# Altium PCB UAV_States_PCB.PcbDoc
Units mm, origin at the board's own origin, x right, y up, seen from the top; angles counter-clockwise.
Board outline 50 x 50 mm, 4 copper layers (Top Layer, GND, PWR, Bottom Layer), stack 1.54 mm thick; 72 components, 62 nets, 356 pads, 125 vias.
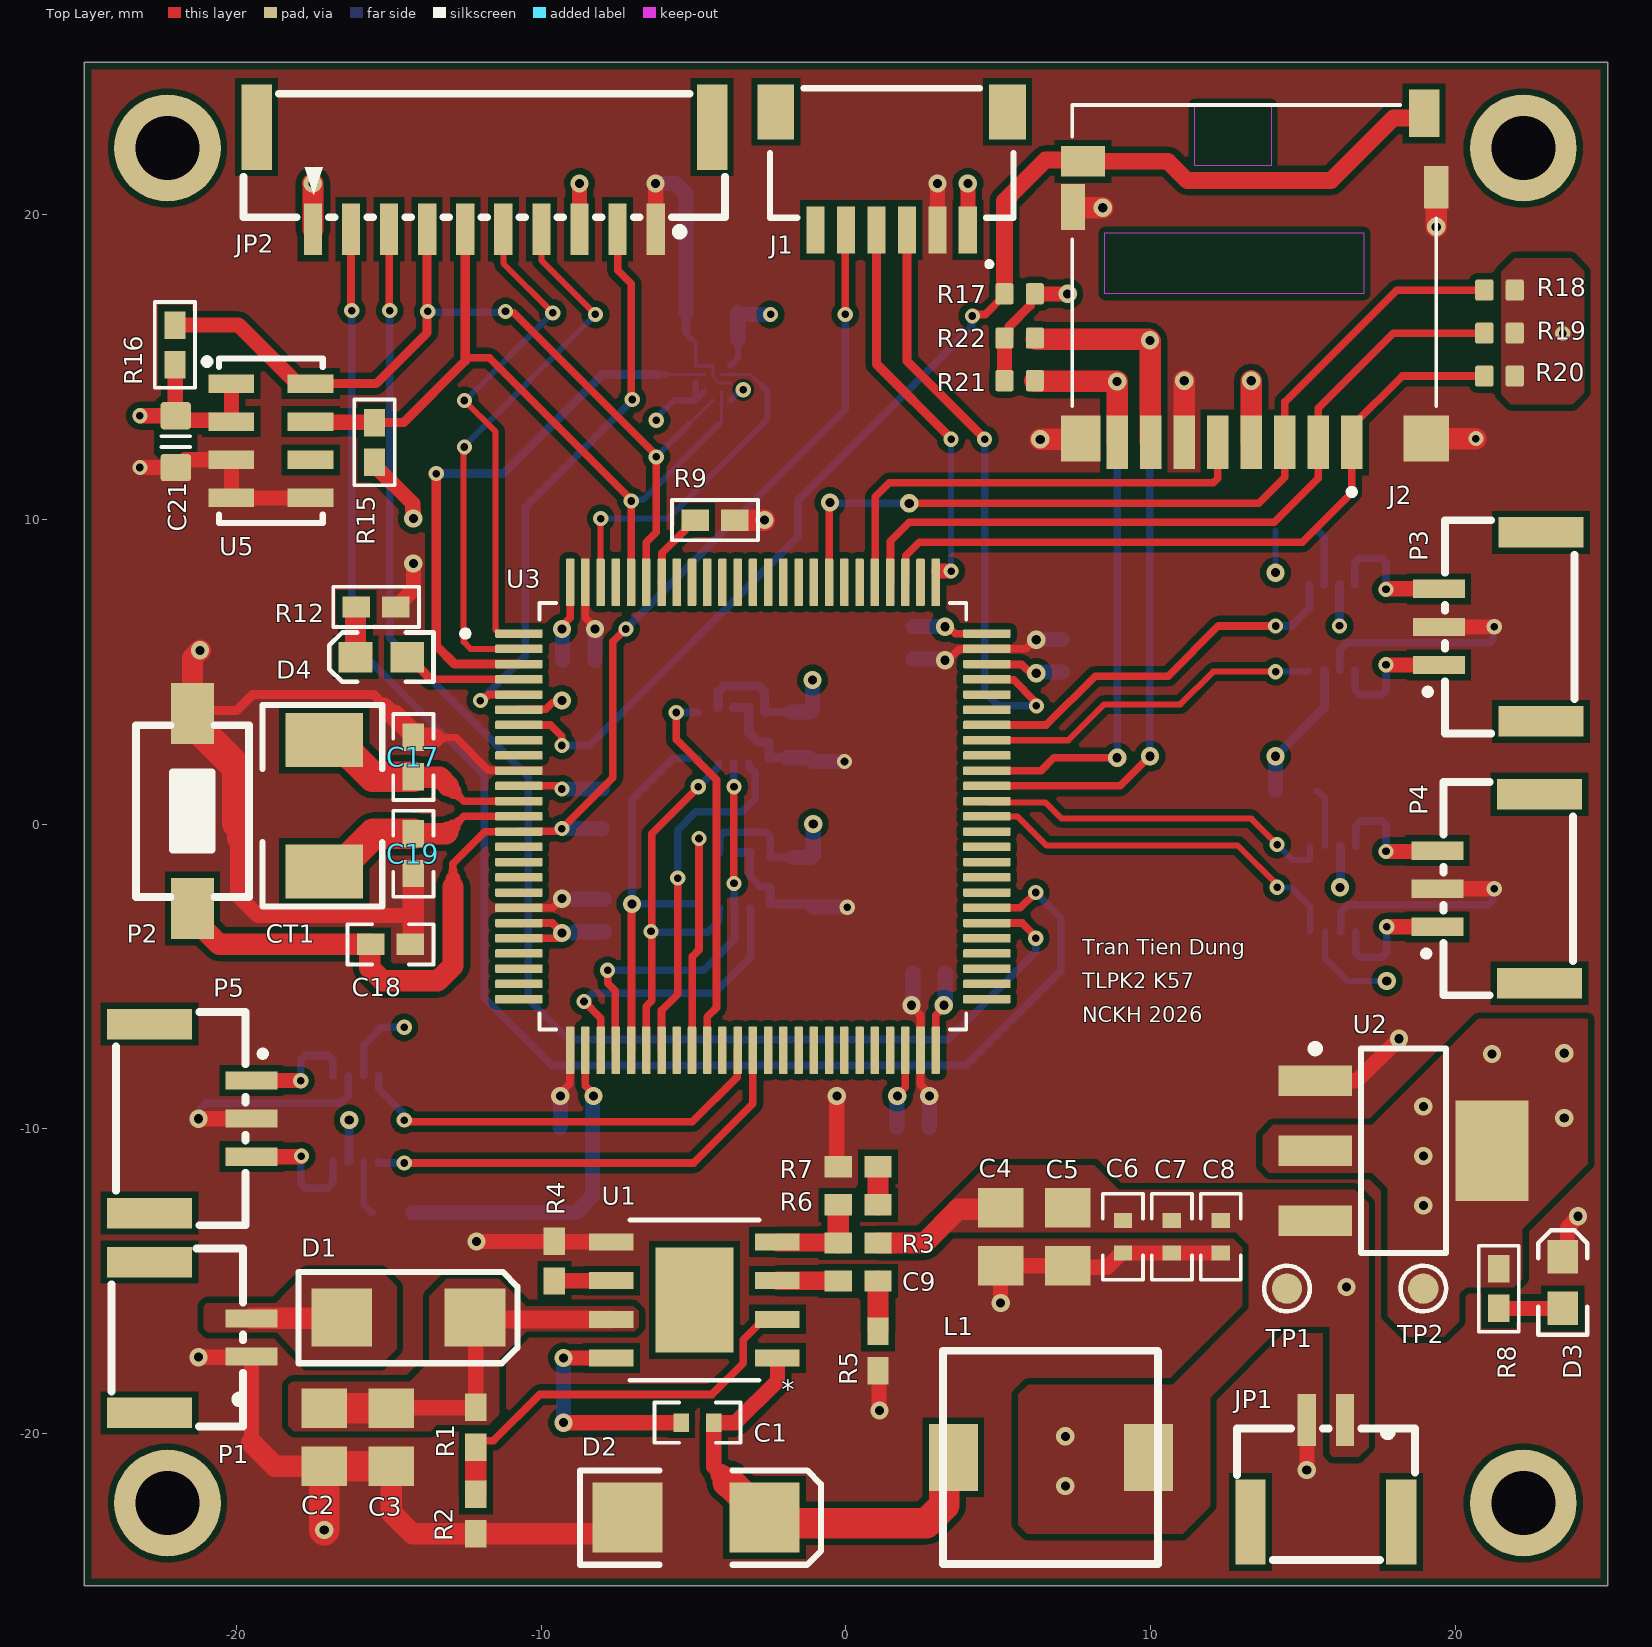
[diagram p0: Top Layer view]
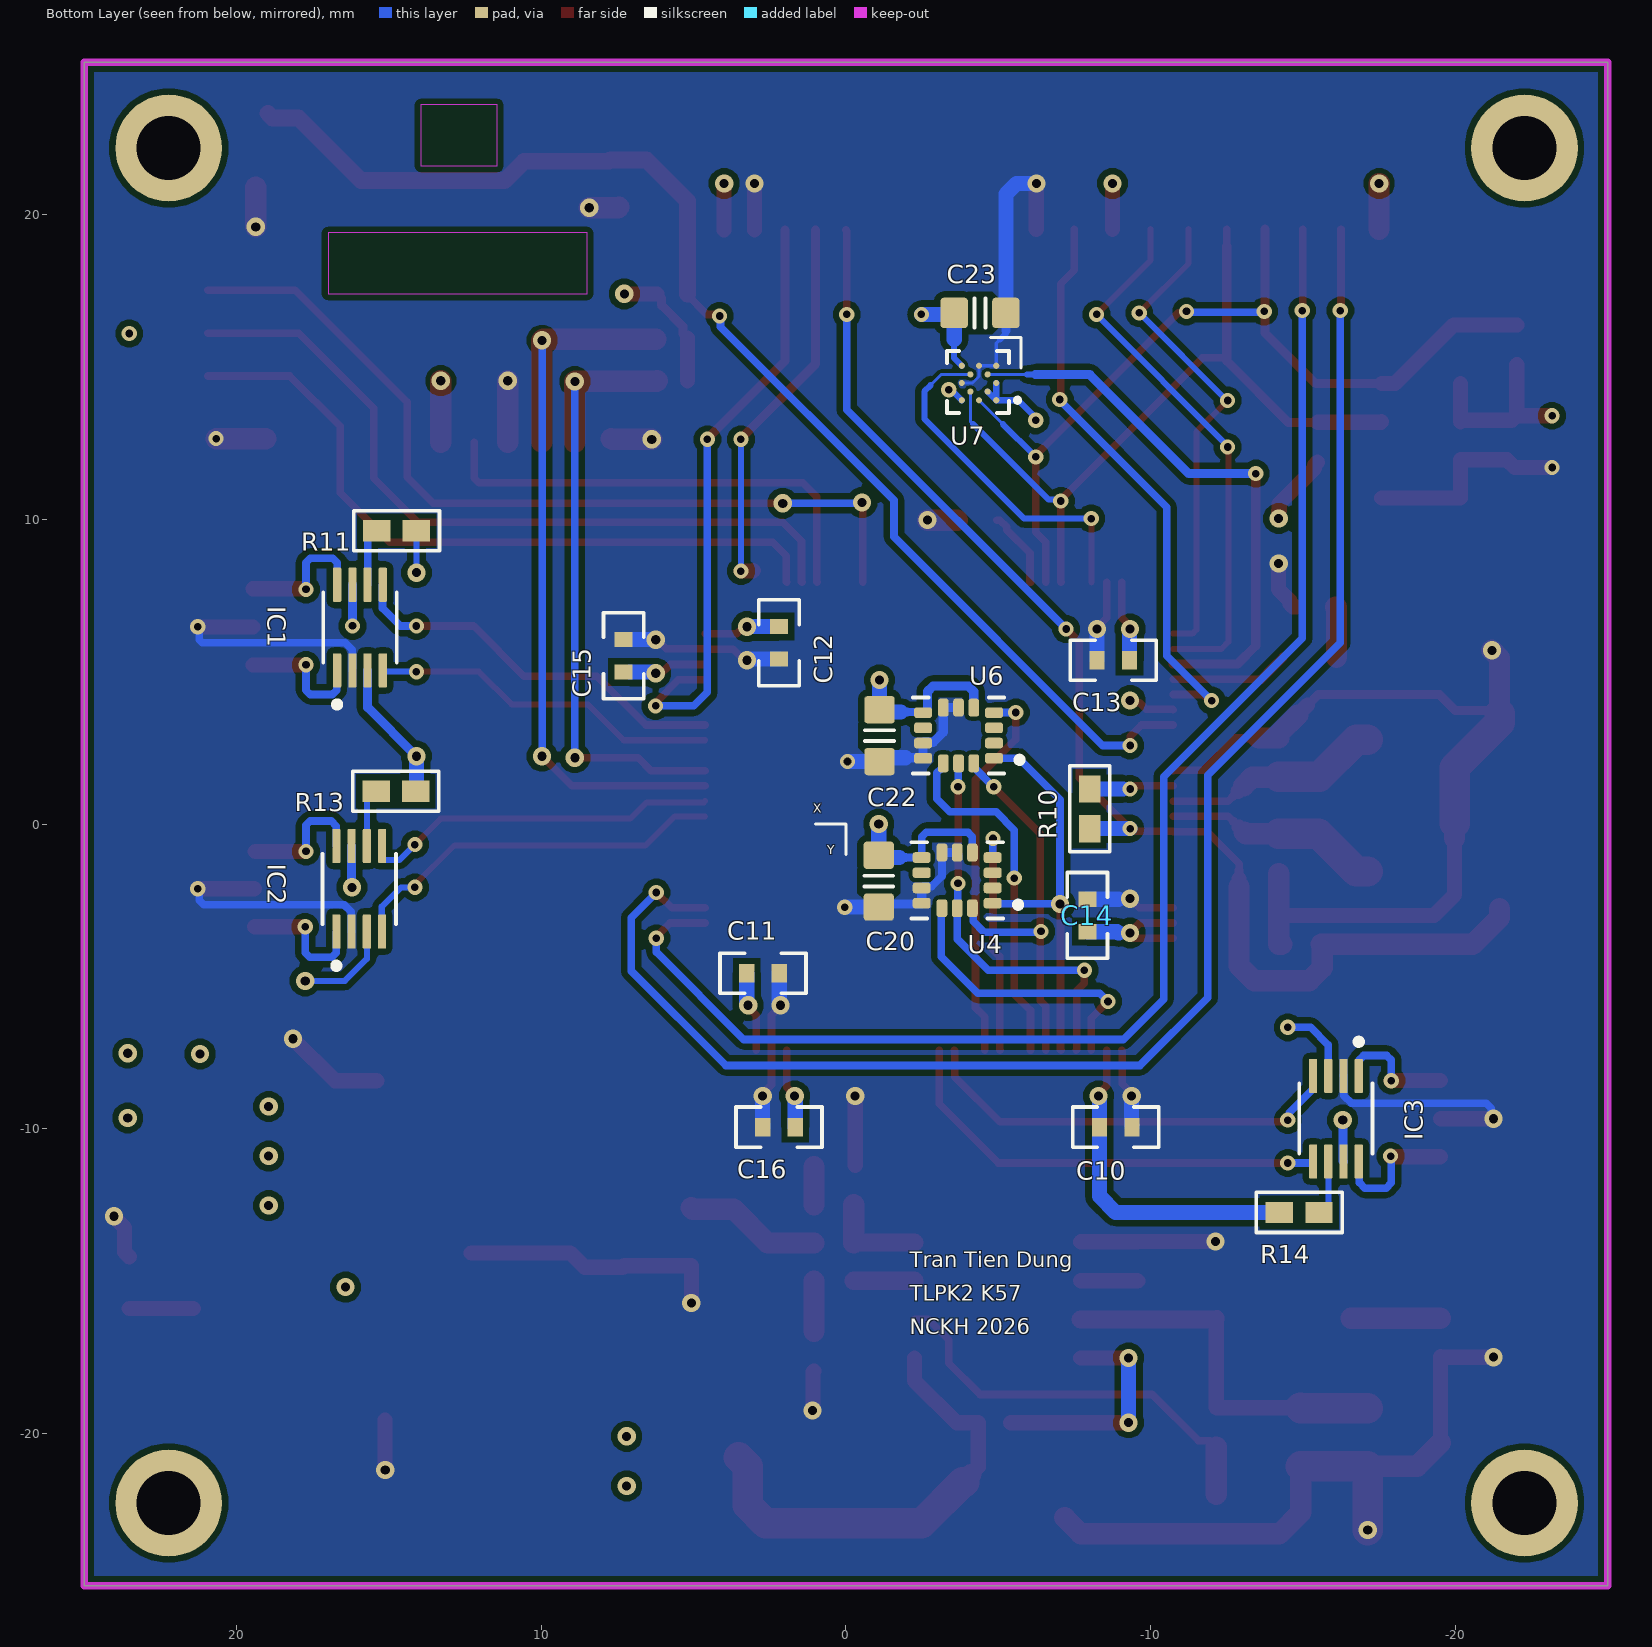
[diagram p1: Bottom Layer view, seen from below]
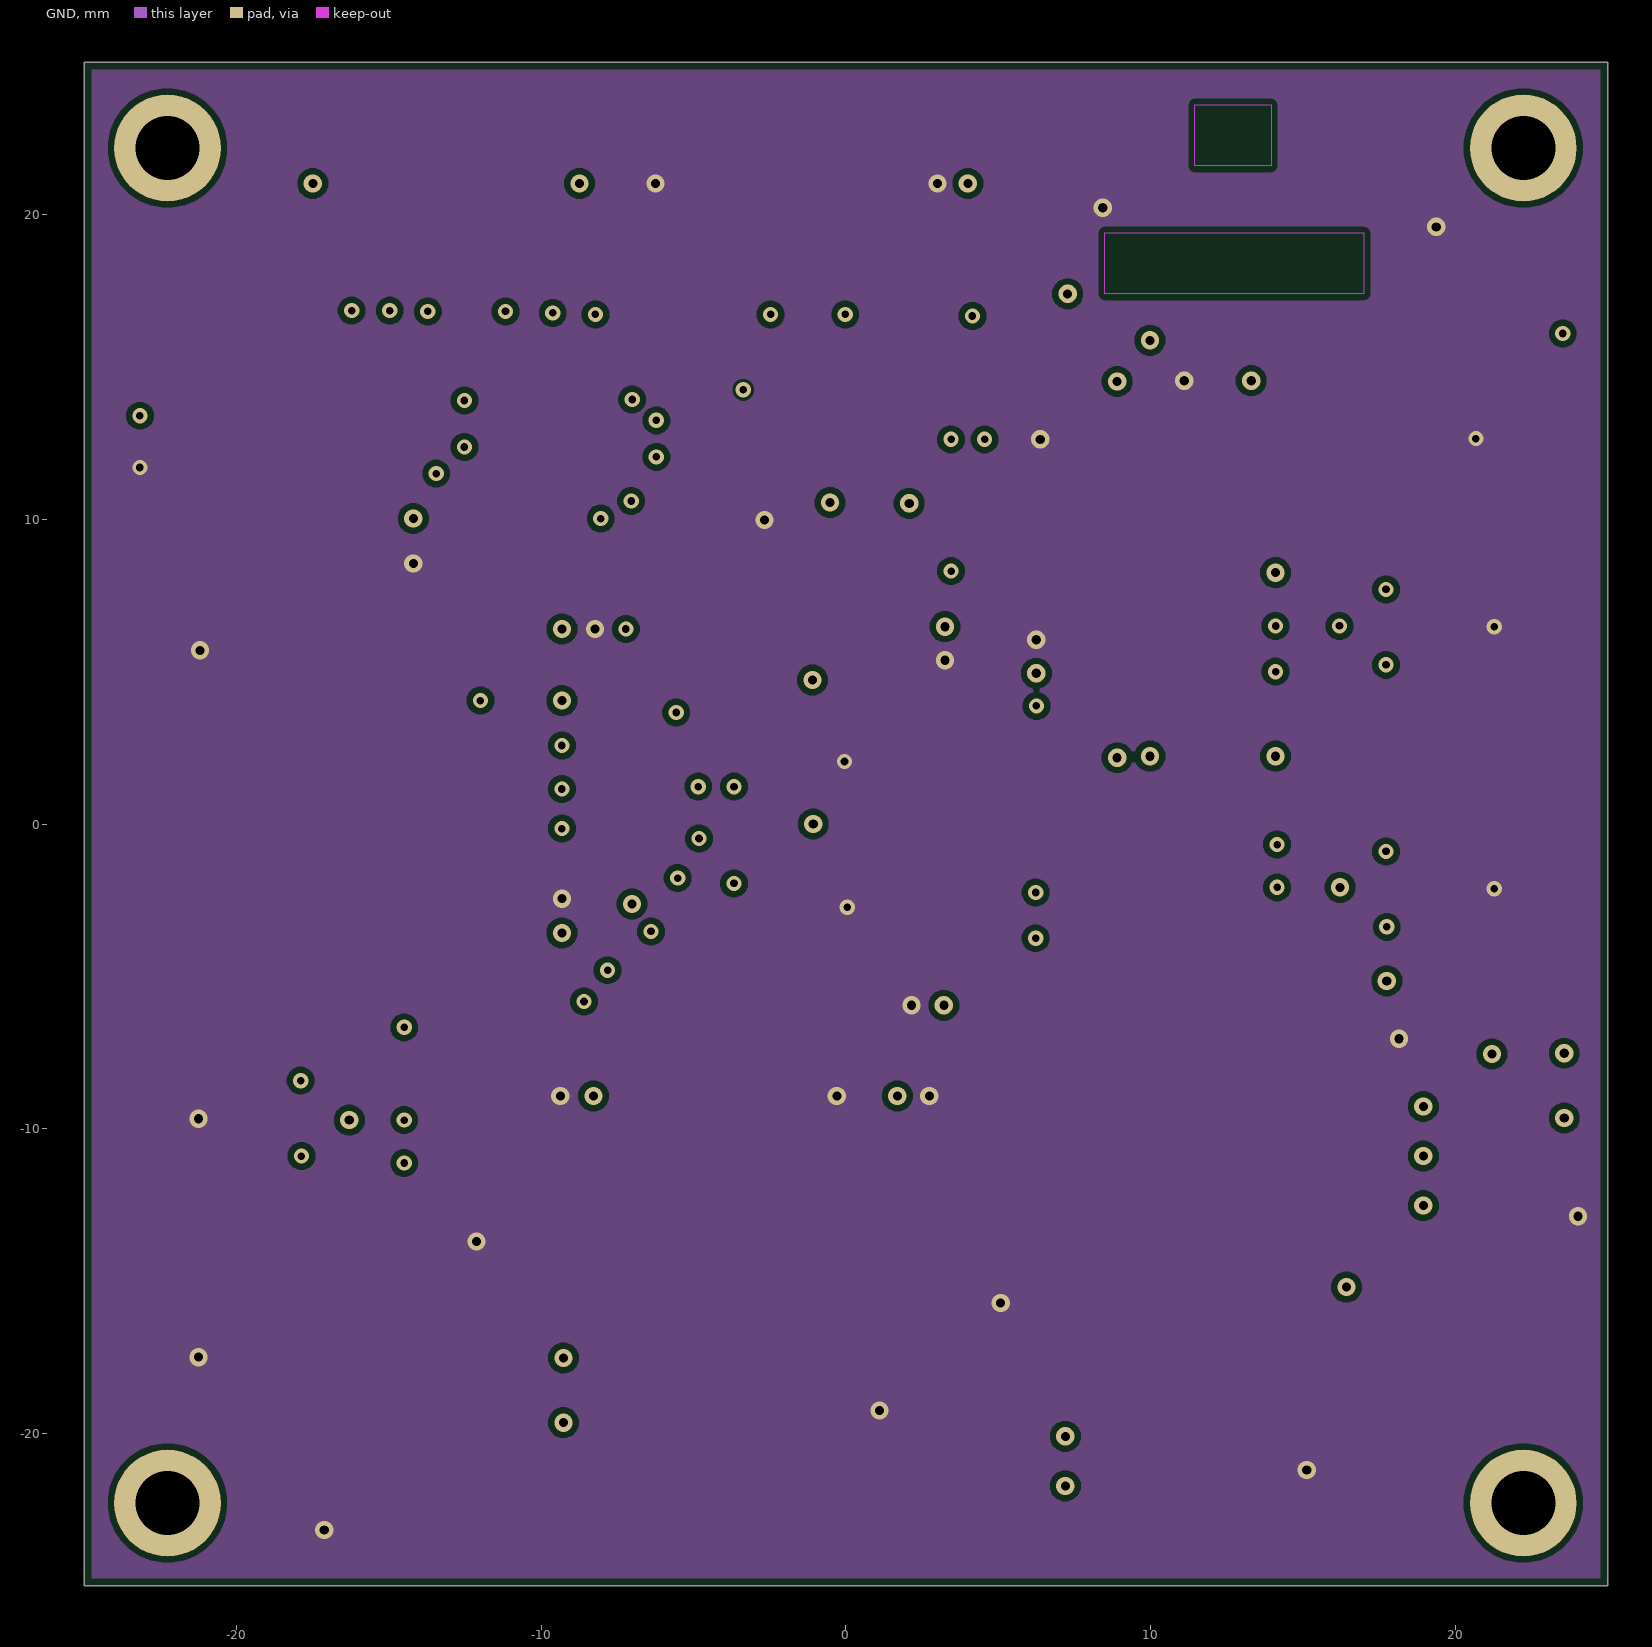
[diagram p2: GND]
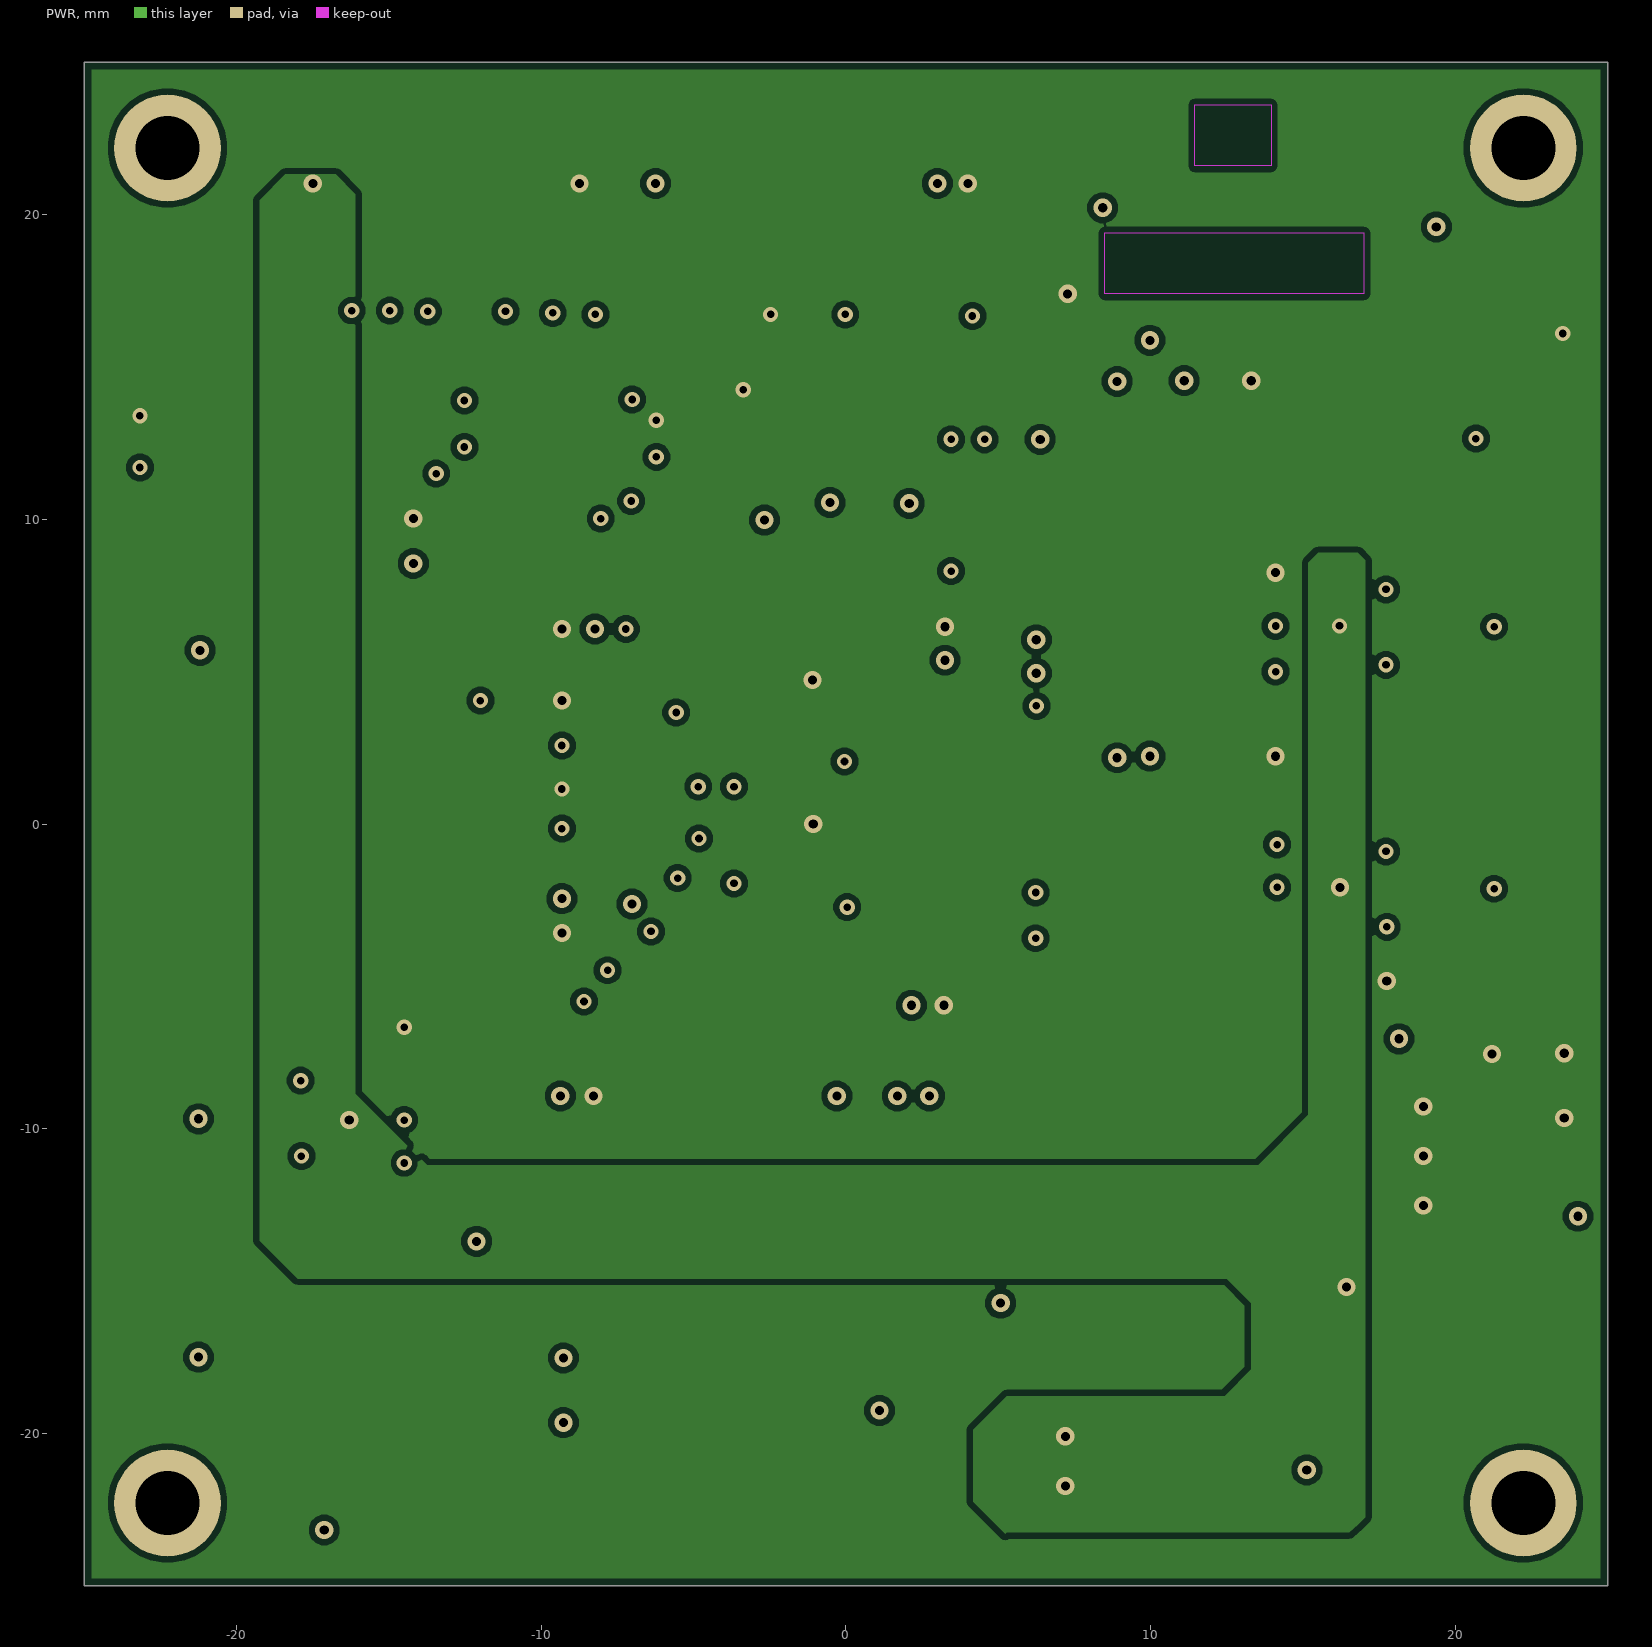
[diagram p3: PWR]
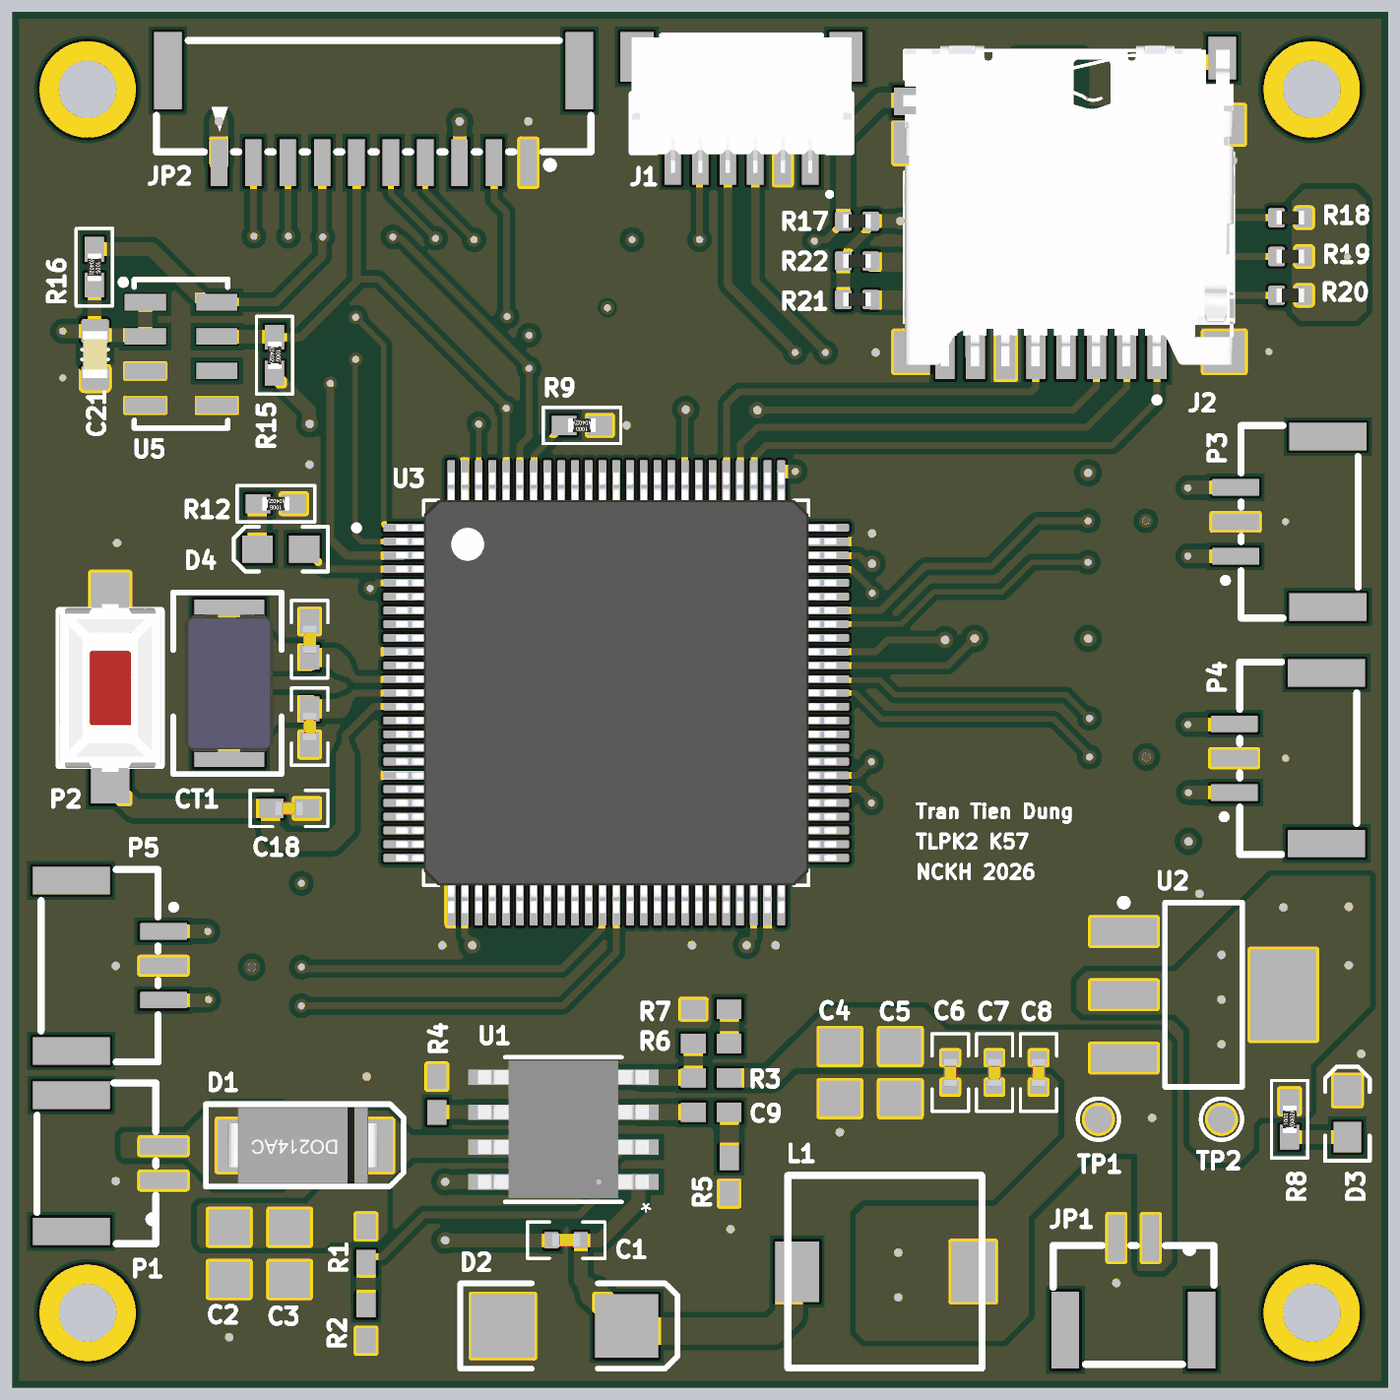
[diagram p4: 3D render of the assembled board from above, using the file's embedded part models]
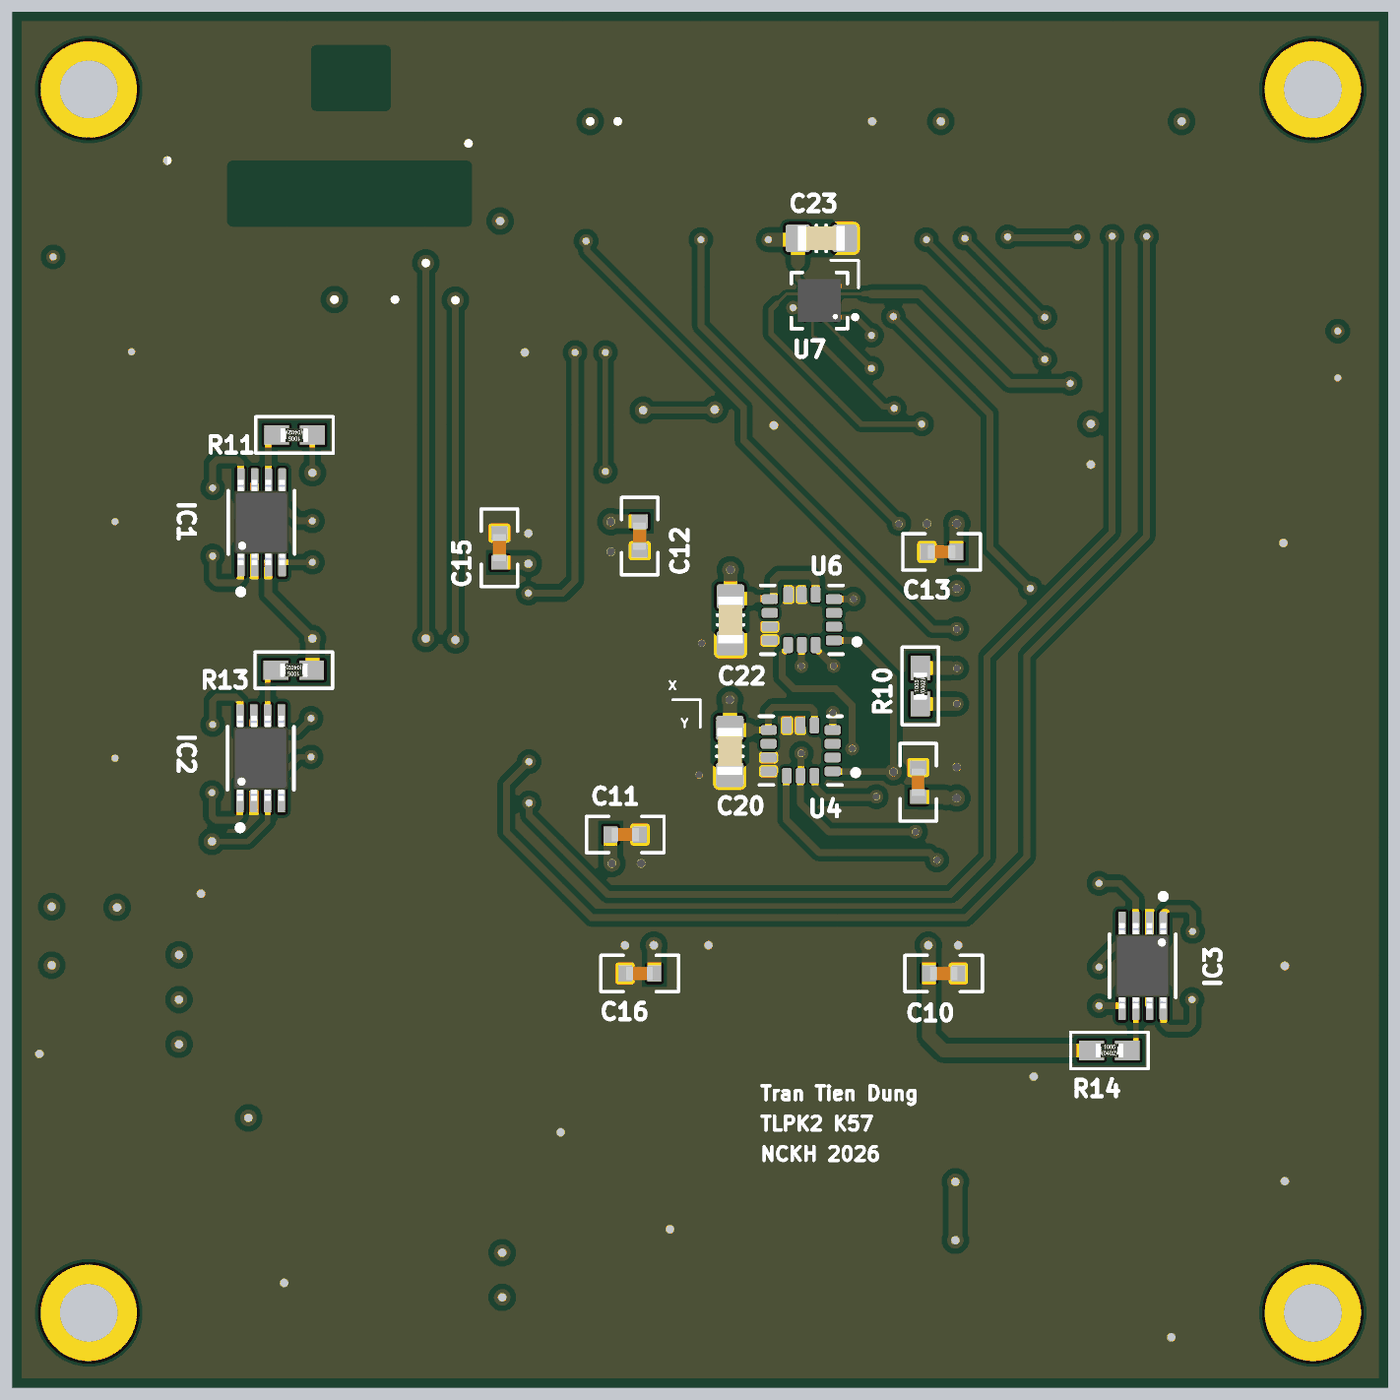
[diagram p5: 3D render of the assembled board from below, using the file's embedded part models]

## Layer stack, top to bottom
Top Solder: solder mask 0.0102, Solder Resist, Dk 3.5
Top Layer: signal copper 0.035
Dielectric 1: prepreg 0.2, FR-4, Dk 4.1
GND: signal copper 0.035
Dielectric 2: core 1, FR-4, Dk 4.8
PWR: signal copper 0.035
Dielectric 3: prepreg 0.2, FR-4, Dk 4.1
Bottom Layer: signal copper 0.035
Bottom Solder: solder mask 0.0102, Solder Resist, Dk 3.5

## Board outline
-25,-25 -25,25 25,25 25,-25

## Design rules (kind name [scope] priority, off if disabled: settings)
Clearance Clearance_BMM150 [WithinRoom('Room_BMM150')] p1: gap=0.1 ignorepadtopadclearanceinfootprint=FALSE
Clearance Clearance_IMU [HasFootprint('PQFN50P300X250X97-14N')] p2: gap=0.127 ignorepadtopadclearanceinfootprint=FALSE
Clearance [All] p3: gap=0.2 ignorepadtopadclearanceinfootprint=FALSE
PlaneConnect [All] p1: pad.planeconnectstyle=Relief pad.reliefexpansion=0.508 pad.reliefentries=4 pad.reliefconductorwidth=0.254 pad.reliefairgap=0.254 via.planeconnectstyle=Direct via.reliefexpansion=0.508 via.reliefentries=4 via.reliefconductorwidth=0.254 via.reliefairgap=0.254
PolygonConnect [All] p1: thpad.connectstyle=Relief thpad.reliefconductorwidth=0.254 thpad.reliefentries=4 thpad.polygonreliefangle="90 Angle" thpad.airgapwidth=0.254 smdpad.connectstyle=Direct smdpad.reliefconductorwidth=0.254 smdpad.reliefentries=4 smdpad.polygonreliefangle="90 Angle" smdpad.airgapwidth=0.254 via.connectstyle=Direct via.reliefconductorwidth=0.254 via.reliefentries=4 via.polygonreliefangle="90 Angle" via.airgapwidth=0.254
RoomDefinition Room_BMM150 [False vs False] p1: confinementstyle=ConfineIn formatcopy=TRUE lockcomponents=FALSE outline -5.95,15.9 -2.775,15.9 -2.775,13.125 -5.95,13.125
RoutingVias [All] p1: holewidth=0.3 width=0.6 viastyle="Through Hole" minholewidth=0.25 minwidth=0.5 maxholewidth=1 maxwidth=2
SilkToSolderMaskClearance [IsPad] p1: minsilkscreentomaskgap=0.15 clearancetoexposedcopper=TRUE
SolderMaskExpansion [All] p1: expansion=0.102 istentingtop=FALSE
Width Width_BMM150 [WithinRoom('Room_BMM150')] p1: maxlimit=0.2 minlimit=0.1 preferedwidth=0.12
Width Power [InNetClass('Power_Class')] p2: maxlimit=5 minlimit=0.254 preferedwidth=0.6 toplayer_minwidth=0.4 midlayer1_maxwidth=0.254 midlayer1_prefwidth=0.254 midlayer2_maxwidth=0.254 midlayer2_prefwidth=0.254 bottomlayer_minwidth=0.4 minimp=50.000000 maximp=50.000000 favimp=50.000000
Width [All] p3: maxlimit=1 minlimit=0.2 preferedwidth=0.254 midlayer1_minwidth=0.254 midlayer1_maxwidth=0.254 midlayer2_minwidth=0.254 midlayer2_maxwidth=0.254 minimp=50.000000 maximp=50.000000 favimp=50.000000
28 further rules are at their usual default settings.

## Classes and differential pairs
component class Designator: C1 C2 C3 C4 C5 C6 C7 C8 C9 C10 C11 C12 C13 C14 D1 D2 D3 JP1 L1 P1 R1 R2 R3 R4 R5 R6 R7 R8 TP1 TP2 U1 U2

## Components (designator, comment, footprint, x,y, rotation, side; value= is the part's Value field where it differs from the comment)
C1 "100nF" "CAPC-0402 (0506)" -4.875,-19.65 r180 top
C2 "22uF" 2012[0805] -17.125,-20.125 r90 top
C3 "10uF" 2012[0805] -14.925,-20.125 r90 top
C4 "22uF" 2012[0805] 5.075,-13.55 r90 top
C5 "47nF" 2012[0805] 7.275,-13.55 r90 top
C6 "100nF" "CAPC-0402 (0506)" 9.089,-13.55 r90 top
C7 "100nF" "CAPC-0402 (0506)" 10.694,-13.55 r90 top
C8 "100nF" "CAPC-0402 (0506)" 12.3,-13.55 r90 top
C9 "150pF" 1005[0402] 0.4,-15 r180 top
C10 "100nF" "CAPC-0402 (0506)" -8.85,-9.95 r0 bottom
C11 "100nF" "CAPC-0402 (0506)" 2.725,-4.9 r0 bottom
C12 "100nF" "CAPC-0402 (0506)" 2.2,5.95 r90 bottom
C13 "100nF" "CAPC-0402 (0506)" -8.775,5.375 r180 bottom
C14 "100nF" "CAPC-0402 (0506)" -7.925,-3 r270 bottom
C15 "Tụ gốm" "CAPC-0402 (0506)" 7.3,5.525 r90 bottom value=2.2uF
C16 "Tụ gốm" "CAPC-0402 (0506)" 2.2,-9.95 r0 bottom value=2.2uF
C17 "22pF" "CAPC-0402 (1005)" -14.2,2.2 r90 top
C18 "100nF" "CAPC-0402 (1005)" -14.95,-3.95 r0 top
C19 "22pF" "CAPC-0402 (1005)" -14.2,-0.975 r270 top
C20 "470nF" CAPC1608X90N#1 -1.075,-1.875 r270 bottom
C21 "470nF" CAPC1608X90N#2 -22,12.55 r270 top
C22 "470nF" CAPC1608X90N#1 -1.1,2.9 r270 bottom
C23 "470nF" CAPC1608X90N#1 -4.4,16.775 r180 bottom
CT1 "16Mhz" CRYSTAL-SMD5032 -17.125,0.6 r90 top value=4Mhz
D1 "Diode" "DIODE SMD" -14.366,-16.302 r180 top
D2 "SS36" SMB -4.925,-22.765 r0 top
D3 "LED" LED_0603_BLUE 23.525,-15.05 r90 top
D4 "BLUE" LED_0603_BLUE -15.25,5.475 r180 top
IC1 "TXS0102DCUR" TXS0102DCUR 15.825,6.575 r90 bottom
IC2 "TXS0102DCUR" TXS0102DCUR 15.85,-2 r90 bottom
IC3 "TXS0102DCUR" TXS0102DCUR -15.954,-9.8 r270 bottom
J1 "SM06B-SRSS-TB__LF__SN_" SM06B-SRSS-TB 1.5,19.898 r180 top
J2 "" AMPHENOL_1140084168 13.4,13.4 r0 top
JP1 "1.25T-2A" BM02B-GHS 15.825,-21.9 r0 top
JP2 "1.25T-10A" BM10B-GHS-TBT -12.025,22.114 r180 top
L1 "4.7uH" "INDUCTOR SMD 7x7" 6.725,-20.788 r90 top
P1 "Header 2" BM02B-GHS -21.85,-16.925 r270 top
P2 "Value" "SW 2P SMD" -21.4,0.425 r270 top
P3 "connector 3P" GH-3AB 21.8,6.425 r90 top
P4 "connector 3P" GH-3AB 21.75,-2.169 r90 top
P5 "connector 3P" GH-3AB -21.85,-9.625 r270 top
R1 "100K" 1005[0402] -12.15,-19.8 r90 top value=1k
R2 "100K" 1005[0402] -12.15,-22.65 r90 top value=1k
R3 "68K" 1005[0402] 0.4,-13.75 r0 top value=1k
R4 "100K" 1005[0402] -9.575,-14.35 r90 top value=1k
R5 "100K" 1005[0402] 1.05,-17.3 r270 top value=1k
R6 "12K" 1005[0402] 0.4,-12.5 r0 top value=1k
R7 "0" 1005[0402] 0.4,-11.25 r0 top value=1k
R8 "330" "RESC-0402 (1005)" 21.425,-15.25 r90 top
R9 "10K" "RESC-0402 (1005)" -4.3,9.975 r180 top
R10 "4.7k" "RESC-0402 (1005)" -8,0.5 r90 bottom
R11 "10K" "RESC-0402 (1005)" 14.75,9.625 r0 bottom value=1K
R12 "470R" "RESC-0402 (1005)" -15.425,7.125 r180 top
R13 "10K" "RESC-0402 (1005)" 14.775,1.075 r0 bottom value=1K
R14 "10K" "RESC-0402 (1005)" -14.875,-12.75 r180 bottom value=1K
R15 "4K7" "RESC-0402 (1005)" -15.475,12.525 r270 top
R16 "4K7" "RESC-0402 (1005)" -22.025,15.725 r270 top
R17 "10k" RES_0402 5.7,17.4 r0 top
R18 "47k" RES_0402 21.45,17.525 r0 top
R19 "47k" RES_0402 21.45,16.114 r0 top
R20 "47k" RES_0402 21.45,14.703 r0 top
R21 "47k" RES_0402 5.7,14.55 r180 top
R22 "47k" RES_0402 5.7,15.95 r180 top
TP1 "" "Test Point 1 MM" 14.475,-15.25 r0 top
TP2 "" "Test Point 1 MM" 18.95,-15.25 r180 top
U1 "MP1584EN-LF-Z" SOIC8E_MPS -4.975,-15.625 r180 top
U2 "LM1117MP-3.3" MP04A_N 18.3,-10.725 r0 top
U3 "STM32H743VIT6" QFP50P1600X1600X160-100N -3.055,0.25 r0 top
U4 "ICM-42688-P" PQFN50P300X250X97-14N -3.65,-1.85 r0 bottom
U5 "MS5611" MS5611_1 -18.767,12.585 r270 top
U6 "ICM-42688-P" PQFN50P300X250X97-14N -3.694,2.906 r0 bottom
U7 "BMM150" XDCR_BMM150 -4.331,14.51 r0 bottom

## Footprints (in the part's own frame and the unit in brackets; to place one, negate y for a bottom-side part, rotate by r counter-clockwise, add the part's x,y. Pads: shape width x height; smd on the part's side, far side on the other; paste and mask are expansions set on the pad)
1005[0402] [mm]
  rect 0.9x0.7 smd: 1(-0.65,0) 2(0.65,0)
2012[0805] [mm]
  rect 1.3x1.5 smd: 1(-0.95,0) 2(0.95,0)
AMPHENOL_1140084168 [mm]
  rect 0.7x1.75 smd: 1(3.2,-0.875) 2(2.1,-0.875) 3(1,-0.875) 4(-0.1,-0.875) 5(-1.2,-0.875) 6(-2.3,-0.875) 7(-3.4,-0.875) 8(-4.5,-0.875)
  rect 1x1.55 smd: 9(5.575,9.925)
  rect 1.45x1 smd: 10(-5.625,8.35)
  rect 1.5x1.5 smd: S1(5.65,-0.75)
  rect 1.3x1.5 smd: S2(-5.7,-0.75)
  rect 0.8x1.4 smd: S3(5.975,7.5)
  rect 0.8x1.5 smd: S4(-5.95,6.85)
  Keep-Out Layer region: 0.55,8.2 -1.95,8.2 -1.95,10.2 0.55,10.2
  Keep-Out Layer region: 3.6,4 -4.9,4 -4.9,6 3.6,6
  silkscreen extent -5.97,-2.6 5.97,10.2, body extent -6.01,-1.27 6.01,10.38, height 1.46
BM02B-GHS [mm]
  rect 0.6x1.7 smd: 1(0.552,2.337) 2(-0.698,2.337)
  rect 1x2.8 smd: 3(2.402,-1.013) 4(-2.548,-1.013)
  silkscreen extent -2.99,-2.26 2.85,2.06
BM10B-GHS-TBT [mm]
  rect 0.6x1.7 smd: 1(5.472,2.591) 2(4.222,2.591) 3(2.972,2.591) 4(1.722,2.591) 5(0.472,2.591) 6(-0.778,2.591) 7(-2.028,2.591) 8(-3.278,2.591) 9(-4.528,2.591) 10(-5.778,2.591)
  rect 1x2.8 smd: 11(-7.628,-0.759) 12(7.322,-0.759)
  silkscreen extent -8.05,-1.85 7.75,2.8
CAPC1608X90N#1 [mm] "Chip Capacitor, Body 1.6x0.8mm, EIA 0603, IPC Medium Density"
  round 0.254 on Mech16: 0(0,0)
  rrect25% 0.9x1 smd: 1(-0.85,0) 2(0.85,0)
  Top Layer pour cut-out: -0.6,0.5 -0.4,0.7 0.4,0.7 0.6,0.5 0.6,-0.5 0.4,-0.7 -0.4,-0.7 -0.6,-0.5
  silkscreen extent -0.18,-0.48 0.18,0.48, body extent -0.85,-0.45 0.85,0.45, height 0.89
CAPC1608X90N#2 [mm] "Chip Capacitor, Body 1.6x0.8mm, EIA 0603, IPC Medium Density"
  round 0.254 on Mech15: 0(0,0)
  rrect25% 0.9x1 smd: 1(-0.85,0) 2(0.85,0)
  Top Layer pour cut-out: -0.6,0.5 -0.4,0.7 0.4,0.7 0.6,0.5 0.6,-0.5 0.4,-0.7 -0.4,-0.7 -0.6,-0.5
  silkscreen extent -0.18,-0.48 0.18,0.48, body extent -0.85,-0.45 0.85,0.45, height 0.89
"CAPC-0402 (0506)" [mm] "Resistor Chip, Body 0.5x0.6mm, IPC High Density"
  rect 0.5x0.6 smd mask+0.1: 1(-0.533,0) 2(0.533,0)
  silkscreen extent -1.41,-0.66 1.41,0.66, body extent -0.5,-0.25 0.5,0.25, height 0.5
"CAPC-0402 (1005)" [mm] "Resistor Chip, Body 1.0x0.5mm, IPC High Density"
  rect 0.9x0.7 smd mask+0.1: 1(-0.65,0) 2(0.65,0)
  silkscreen extent -1.41,-0.66 1.41,0.66, body extent -0.5,-0.25 0.5,0.25, height 0.5
CRYSTAL-SMD5032 [mil] "DO-214-AA/SMB; 2 C-Bend Leads; Body 5.3 x 3.6 mm, inc. leads (LxW)"
  rect 70x100 smd: 1(-85,0) 2(85,0)
  silkscreen extent -130,-75 130,80, body extent -98,-63 98,63, height 51
"DIODE SMD" [mm]
  rect 2x1.9 smd: 1(2.184,-0.102) 2(-2.184,-0.102)
  silkscreen extent -3.58,-1.6 3.61,1.4, body extent -2.67,-1.5 2.82,1.3, height 2.3
GH-3AB [mm]
  rect 0.6x1.7 smd: 0(1.294,2.337) 1(0.044,2.337) 2(-1.206,2.337)
  rect 1x2.8 smd: 3(-3.056,-1.013) 3(3.144,-1.013)
  silkscreen extent -3.46,-2.11 3.54,2.81
"INDUCTOR SMD 7x7" [mm]
  rect 2.2x1.6 smd: 1(0,3.2) 2(0,-3.2)
  silkscreen extent -3.5,-3.52 3.5,3.54
LED_0603_BLUE [mm] "LED SMD; Body 1.6 x 0.8 mm (LxW typ)"
  rect 1.1x1 smd mask+0.1: 1(-0.851,0) 2(0.849,0)
  silkscreen extent -1.71,-0.81 1.71,0.81, body extent -0.8,-0.4 0.8,0.4, height 0.75
MP04A_N [mm]
  rect 2.4x1 smd: 1(-2.9,2.3) 2(-2.9,0) 3(-2.9,-2.3)
  rect 2.4x3.3 smd: 4(2.9,0)
  silkscreen extent -3.02,-3.35 1.4,3.47, body extent -1.85,-3.35 1.85,3.35, height 1.8
MS5611_1 [mm]
  rect 0.6x1.5 smd paste+0 mask+0.051: 1(-1.869,-1.407) 2(-0.619,-1.407) 3(0.631,-1.407) 4(1.881,-1.407) 5(1.881,1.193) 6(0.631,1.193) 7(-0.619,1.193) 8(-1.869,1.193)
  silkscreen extent -2.69,-2.29 2.71,1.59
PQFN50P300X250X97-14N [mm]
  rrect50% 0.59x0.35 smd mask+0: 1(-1.165,0.75) 2(-1.165,0.25) 3(-1.165,-0.25) 4(-1.165,-0.75) 8(1.165,-0.75) 9(1.165,-0.25) 10(1.165,0.25) 11(1.165,0.75)
  rrect50% 0.35x0.59 smd mask+0: 5(-0.5,-0.915) 6(0,-0.915) 7(0.5,-0.915) 12(0.5,0.915) 13(0,0.915) 14(-0.5,0.915)
  silkscreen extent -2.1,-1.25 1.5,1.25
QFP50P1600X1600X160-100N [mm]
  rrect25% 1.56x0.28 smd: 1(-7.68,6) 2(-7.68,5.5) 3(-7.68,5) 4(-7.68,4.5) 5(-7.68,4) 6(-7.68,3.5) 7(-7.68,3) 8(-7.68,2.5) 9(-7.68,2) 10(-7.68,1.5) 11(-7.68,1) 12(-7.68,0.5) 13(-7.68,0) 14(-7.68,-0.5) 15(-7.68,-1) 16(-7.68,-1.5) 17(-7.68,-2) 18(-7.68,-2.5) 19(-7.68,-3) 20(-7.68,-3.5) 21(-7.68,-4) 22(-7.68,-4.5) 23(-7.68,-5) 24(-7.68,-5.5) 25(-7.68,-6) 51(7.68,-6) 52(7.68,-5.5) 53(7.68,-5) 54(7.68,-4.5) 55(7.68,-4) 56(7.68,-3.5) 57(7.68,-3) 58(7.68,-2.5) 59(7.68,-2) 60(7.68,-1.5) 61(7.68,-1) 62(7.68,-0.5) 63(7.68,0) 64(7.68,0.5) 65(7.68,1) 66(7.68,1.5) 67(7.68,2) 68(7.68,2.5) 69(7.68,3) 70(7.68,3.5) 71(7.68,4) 72(7.68,4.5) 73(7.68,5) 74(7.68,5.5) 75(7.68,6)
  rrect25% 0.28x1.56 smd: 26(-6,-7.68) 27(-5.5,-7.68) 28(-5,-7.68) 29(-4.5,-7.68) 30(-4,-7.68) 31(-3.5,-7.68) 32(-3,-7.68) 33(-2.5,-7.68) 34(-2,-7.68) 35(-1.5,-7.68) 36(-1,-7.68) 37(-0.5,-7.68) 38(0,-7.68) 39(0.5,-7.68) 40(1,-7.68) 41(1.5,-7.68) 42(2,-7.68) 43(2.5,-7.68) 44(3,-7.68) 45(3.5,-7.68) 46(4,-7.68) 47(4.5,-7.68) 48(5,-7.68) 49(5.5,-7.68) 50(6,-7.68) 76(6,7.68) 77(5.5,7.68) 78(5,7.68) 79(4.5,7.68) 80(4,7.68) 81(3.5,7.68) 82(3,7.68) 83(2.5,7.68) 84(2,7.68) 85(1.5,7.68) 86(1,7.68) 87(0.5,7.68) 88(0,7.68) 89(-0.5,7.68) 90(-1,7.68) 91(-1.5,7.68) 92(-2,7.68) 93(-2.5,7.68) 94(-3,7.68) 95(-3.5,7.68) 96(-4,7.68) 97(-4.5,7.68) 98(-5,7.68) 99(-5.5,7.68) 100(-6,7.68)
  silkscreen extent -9.54,-7 7,7, body extent -8,-8 8,8, height 1.6
RES_0402 [mm]
  rrect25% 0.6x0.7 smd: 1(-0.5,0) 2(0.5,0)
  body extent -0.5,-0.25 0.5,0.25, height 0.3
"RESC-0402 (1005)" [mm] "Resistor Chip, Body 1.0x0.5mm, IPC High Density"
  rect 0.9x0.7 smd mask+0.1: 1(-0.65,0) 2(0.65,0)
  silkscreen extent -1.41,-0.66 1.41,0.66, body extent -0.5,-0.25 0.5,0.25, height 0.35
SM06B-SRSS-TB [mm]
  rect 0.6x1.55 smd: 1(-2.5,0.4) 2(-1.5,0.4) 3(-0.5,0.4) 4(0.5,0.4) 5(1.5,0.4) 6(2.5,0.4)
  rect 1.2x1.8 smd: 7(3.8,-3.475) 8(-3.8,-3.475)
  silkscreen extent -4,-4.25 4,1.59, body extent -4,-4.18 4,0.77, height 2.96
SMB [mm] "DO-214-AA/SMB; 2 C-Bend Leads; Body 5.3 x 3.6 mm, inc. leads (LxW)"
  rect 2.3x2.3 smd: 1(-2.25,0) 2(2.25,0)
  silkscreen extent -3.8,-1.55 4.1,1.55
SOIC8E_MPS [mil]
  rect 57.5x22 smd paste+0 mask+0: 1(-107.25,75) 2(-107.25,25) 3(-107.25,-25) 4(-107.25,-75) 5(107.25,-75) 6(107.25,-25) 7(107.25,25) 8(107.25,75)
  rect 101x136 smd paste-67.5 mask+0: EPAD(0,0)
  silkscreen extent -84,-104 84,103, body extent -122,-99 122,99, height 67
"SW 2P SMD" [mm]
  rect 2x1.4 smd: 1(-3.2,-0.051) 2(3.2,-0.051)
  silkscreen extent -2.82,-1.91 2.82,1.8, body extent -3.05,-1.9 3.05,1.8, height 2.5
"Test Point 1 MM" [mm] "Test Point 1 MM"
  round 1 smd: 0(0,0)
  silkscreen extent -0.75,-0.75 0.75,0.75
TXS0102DCUR [mm]
  rrect25% 1.12x0.27 smd: 1(-1.532,0.877) 2(-1.532,0.377) 3(-1.532,-0.123) 4(-1.532,-0.623) 5(1.278,-0.623) 6(1.278,-0.123) 7(1.278,0.377) 8(1.278,0.877)
  silkscreen extent -2.75,-1.08 1.02,1.33, body extent -1.68,-0.87 1.42,1.13, height 0.9
XDCR_BMM150 [mm]
  round 0.2 smd: A1(-0.601,0.601) A3(-0.035,0.601) A5(0.531,0.601) B2(-0.318,0.318) B4(0.248,0.318) C1(-0.601,0.035) C5(0.531,0.035) D2(-0.318,-0.248) D4(0.248,-0.248) E1(-0.601,-0.531) E3(-0.035,-0.531) E5(0.531,-0.531)
  silkscreen extent -1.37,-1.02 1.02,1.02, body extent -0.78,-0.78 0.78,0.78, height 0.6

## Part data
C1 C2 C3 C4 C5 C6 C7 C8 C9 C10 C11 C12 C13 C14: library part "TU THUONG"
C15 C16 C17 C18 C19 C20 C21 C22 C23: library part "CAP C_0603", "Capacitor SMD Cer 470nF 10% 16V X7R 0603", Manufacturer 1="Murata Electronics North America", Manufacturer 2="TDK Corporation", Manufacturer 3="Taiyo Yuden", Manufacturer 4=Samsung, Manufacturer Part Number 1=GRM188R71C474KA88D, Manufacturer Part Number 2=C1608X7R1C474K, Manufacturer Part Number 3=EMK107B7474KA-T, Manufacturer Part Number 4=CL10B474KONE, Package / Case="0603 (1608 metric)", Ratings="16V; X7R", Supplier Part Number 1=490-3295-2-ND, Tolerance=±10%, ComponentLink1Description=http://psearch.murata.com/capacitor/product/GRM188R71C474KA88#.pdf, ComponentLink1URL=http://psearch.murata.com/capacitor/product/GRM188R71C474KA88#.pdf, ComponentLink2Description=http://product.tdk.com/capacitor/mlcc/en/documents/mlcc_commercial_general_en.pdf, ComponentLink2URL=http://product.tdk.com/capacitor/mlcc/en/documents/mlcc_commercial_general_en.pdf, ComponentLink3Description=http://www.yuden.co.jp/or/product/category/capacitor/EMK107B7474KA-T.pdf, ComponentLink3URL=http://www.yuden.co.jp/or/product/category/capacitor/EMK107B7474KA-T.pdf, Material=ceramic, SCDType=spec, Supplier 1=Digi-Key, Supplier 2=Digi-Key, Supplier 3=Digi-Key, Supplier Part Number 2=445-5192-2-ND, Supplier Part Number 3=587-1250-2-ND
CT1: library part CRYSTAL, "Crystal For all Crystal 2pin."
D2: library part Diode, "Default Diode", PackageDocument=Sep-1996, Code_JEDEC=DO-214-AB, LatestRevisionDate=17-Jul-2002, LatestRevisionNote="Re-released for DXP Platform.", PackageReference=SMC, Published=8-Jun-2000, Publisher="Altium Limited"
D4: library part "LED BLUE 0603", "LED BLUE 0603 SMD", Solder=SMT
IC1 IC2 IC3: "Integrated Circuit", Manufacturer_Name="Texas Instruments", Mouser Part Number=595-TXS0102DCUR, Arrow Part Number=TXS0102DCUR, Arrow Price/Stock=https://www.arrow.com/en/products/txs0102dcur/texas-instruments?region=nac, Datasheet Link=https://datasheet.datasheetarchive.com/originals/distributors/SFDatasheet-7/sf-000145437.pdf, Height=0.9mm, Manufacturer_Part_Number=TXS0102DCUR, Mouser Price/Stock=https://www.mouser.co.uk/ProductDetail/Texas-Instruments/TXS0102DCUR?qs=dB0LedT%252BmmBcQ3I%2Fs9XEDA%3D%3D
J1: "Connector", Manufacturer_Name="JST (JAPAN SOLDERLESS TERMINALS)", Manufacturer_Part_Number="SM06B-SRSS-TB (LF)(SN)", Datasheet Link=http://uk.rs-online.com/web/p/products/5468827
J2: library part 1140084168, "MEMORY CARD CONNECTOR, MICROSD, 8 POSITION, FULL REEL; Memory / Card Type:MicroSD; Insert & Eject Mechanism:Push-Pull; No. of Contacts:8Contacts; Contact Material:Copper Alloy; Contact Plating:Gold Plated Contacts; Product Range:- RoHS Compliant: Yes", Package=None, Check_prices=https://www.snapeda.com/parts/114-00841-68../Amphenol/view-part/?ref=eda, MF="amphenol communications solutions", MP=114-00841-68.., SnapEDA_Link=https://www.snapeda.com/parts/114-00841-68../Amphenol/view-part/?ref=snap
JP1: library part "Header 1_2.54_2P", "Cắm", Chung_Loai=Cắm
JP2: library part "Header 1_2.54_10P", "Cắm", Chung_Loai=Cắm, Don_Vi=Con
L1: library part "Inductor SMD"
P1: "Header, 2-Pin", LatestRevisionDate=17-Jul-2002, LatestRevisionNote="Re-released for DXP Platform.", Publisher="Altium Limited"
P2: library part "Button 2 SMD", "SMD Mini Push Button Switch 2 Pin 3x6x2.7mm", MPN="SMD Mini Push Button 2 SMD", Link=https://ram-e-shop.com/product/press2pin-smd/
R1 R2 R3 R4 R5 R6 R7: library part Res1, "Resistor", LatestRevisionDate=17-Jul-2002, LatestRevisionNote="Re-released for DXP Platform.", PackageDescription="Axial Device, Thru-Hole; 2 Leads; 0.3 in Pin Spacing", PackageReference=AXIAL-0.3, Published=8-Jun-2000, Publisher="Altium Limited"
R8 R11 R13 R14: library part "Res Semi", "Semiconductor Resistor", LatestRevisionDate=17-Jul-2002, LatestRevisionNote="Re-released for DXP Platform.", PackageDescription="Axial Device, Thru-Hole; 2 Leads; 0.5 in Pin Spacing", PackageReference=AXIAL-0.5, Published=8-Jun-2000, Publisher="Altium Limited"
R9: library part RC0603FR-0710KL, "RES SMD 10K OHM 1% 1/10W 0603", Category=RESISTOR, CompanyID=VT-00328, MPN=RC0603FR-0710KL, Solder=SMT
R10: library part "Tro 0603 5% 4.7k", "Dán", Chung_Loai=Dán, Don_Vi=Con, Ma_Hang=MH006327, So_Chan=2, Ten_Linh_Kien="Trở 0603 5% 4.7k"
R12: library part "Tro 0603 5% 470R", "Dán", Chung_Loai=Dán, Don_Vi=Con, Ma_Hang=MH006328, So_Chan=2, Ten_Linh_Kien="Trở 0603 5% 470R"
R15 R16: library part RC0603FR-074K7L, "RES SMD 4.7K OHM 1% 1/10W 0603", Category=RESISTOR, CompanyID=VT-00327, MPN=RC0603FR-074K7L, Solder=SMT
R17 R18 R19 R20 R21 R22: library part RES_0402, "Resistor SMD 0402"
TP1 TP2: library part "Test Point", "Test Point", Solder=NF
U1: "No Description Available", Mfr_Name="Monolithic Power Systems", Copyright="Copyright (C) 2023 Ultra Librarian. All rights reserved.", Manufacturer_Part_Number=MP1584EN-LF-Z, RefDes=RefDes, Type=DEV
U2: "800mA Low-Dropout Linear Regulator, 4-pin SOT-223", Manufacturer="National Semiconductor", PackageTopMarking=XYTT*N05A, PowerWise=N, Supplier Part Number 1=9778195, Code_IPC=SOT223-4, Code_JEDEC=TO-261-AA, ComponentLink1Description="LM1117 Datasheet", ComponentLink1URL=http://www.national.com/ds/LM/LM1117.pdf, ComponentLink2Description="LM1117 Web Page", ComponentLink2URL=http://www.national.com/pf/LM/LM1117.html, ComponentLink3Description="MP04A Package Page", ComponentLink3URL=http://www.national.com/packaging/folders/mp04a.html, CompType="LDO IC", DatasheetVersion=Apr-2006, PackageDescription="Molded SOT-223, 6.50 x 3.56 x 1.6mm Body, 4 Lead, 2.3mm Pitch", PackageReference=MP04A, PackageVersion="revB, Apr-2003", PartNumber=LM1117MP-3.3, PinCount=4, Published=4-Dec-2008, Publisher="Altium Limited", RoHS=N, Supplier 1=Farnell, Supplier 2=Farnell, Supplier Part Number 2=9778195RL
U3: "ARMÂ® CortexÂ®-M7 STM32H7 Microcontroller IC 32-Bit Single-Core 480MHz 2MB (2M x 8) FLASH 100-LQFP (14x14)", Package="LQFP-100 STMicroelectronics", Check_prices=https://www.snapeda.com/parts/STM32H743VIT6/STMicroelectronics/view-part/?ref=eda, MF=STMicroelectronics, MP=STM32H743VIT6, SnapEDA_Link=https://www.snapeda.com/parts/STM32H743VIT6/STMicroelectronics/view-part/?ref=snap
U4 U6: "Accelerometer, Gyroscope, 6 Axis Sensor Output", Package=None, Availability=Unavailable, MP=ICM-42688-P, Price=None
U7: "FlipCore, Hall Effect Sensor X, Y, Z Axis 12-WLCSP (1.56x1.56)", Package="WLCSP-12 Bosch", Check_prices=https://www.snapeda.com/parts/BMM150/Bosch/view-part/?ref=eda, MF="Bosch Sensortec", MP=BMM150, SnapEDA_Link=https://www.snapeda.com/parts/BMM150/Bosch/view-part/?ref=snap

## Free pads (board coordinates)
  round 3.5 hole 2.1: 1(-22.27,-22.288) 1(-22.27,22.187) 1(22.23,-22.288) 1(22.23,22.187)

## Via types
v1: diameter 0.6, hole 0.3, Top Layer to Bottom Layer, tented both sides, 65 vias
v2: diameter 0.5, hole 0.25, Top Layer to Bottom Layer, tented both sides, 60 vias

## Nets (pads, with @x,y where several pads share a name; then routed paths per layer and width w, separated by ;. In a path a pad name is that pad's centre, name@x,y a point inside that pad or via, vN(x,y) a via of type N, cw(c..) or ccw(c..) an arc to the next point about the centre after c; other vN are vias at no path point)
3.3V: C10.2 C11.2 C12.2 C13.2 C14.2 C20.1 C21.1 C22.1 C23.1 IC1.3 IC2.3 IC3.3 J1.1 J2.4 JP2.8 R8.2 R10.2 R11.1 R13.1 R14.1 R15.2 R16.2 R17.2 R18.2 R19.2 R20.2 R21.2 R22.2 TP2.0 U2.2 U2.4 U3.6 U3.11 U3.20 U3.21 U3.27 U3.50 U3.75 U3.100 U4.5 U4.8 U5.1 U5.2 U6.5 U6.8 U7.A1 U7.A5 U7.B2 U7.C1 U7.E5 | length 73.4
  Top Layer w0.25: U3.21 -9.325,-3.75 v1@-9.237,-3.662 ; U3.20 -9.633,-3.25 -9.325,-3.558 v1(-9.325,-3.575) ; U3.11 -9.493,1.25 -9.393,1.15 v2(-9.325,1.15) ; U3.6 -10.72,3.765 -9.861,3.765 -9.643,3.983 -9.392,3.983 v1(-9.325,4.05) ; v1(-9.325,6.4) -9.325,6.495 -9.055,6.765 U3.100 ; U3.27 -8.555,-8.585 -8.289,-8.851 v1(-8.289,-8.925) ; U3.50 2.945,-6.275 3.211,-6.009 v1(3.211,-5.95) ; v1@3.275,6.475 3.358,6.475 3.583,6.25 U3.75
  Top Layer w0.3: R22.2 5.35,16.1 5.35,16.325 6.05,17.025 6.05,17.25 R17.2
  Top Layer w0.5: v2(-23.175,13.4) C21.1 ; R16.2 -22.013,15.062 -22.013,13.412 C21.1 ; U5.1 U5.2 -20.224,13.254 -21.854,13.254 C21.1 ; R15.2 -15.375,11.775 -15.375,11.675 -14.219,10.519 -14.219,10.294 v1@-14.2,10.275 ; JP2.8 v1(-8.747,21.025) ; J1.1 v1@4,21 ; R21.2 R22.2 ; R17.2 v1(7.275,17.4)
  Top Layer w0.7: J2.4 v1(13.3,14.55)
  Bottom Layer w0.2: v2(-6.225,13.25) -6.225,13.331 -5.647,13.909 U7.A1 ; U7.C1 U7.A1 ; U7.B2 U7.A1 ; U7.E5 -3.55,15.291 -3.55,15.9 ; U7.A5@-3.799,13.91 -3.796,13.91 -3.456,14.25 v2(-3.375,14.25) ; v1(14.1,8.25) R11.1 ; IC2.3 15.727,-4.427 16.45,-5.15 v1(17.75,-5.15)
  Bottom Layer w0.25: IC3.3 -15.831,-7.255 -15.251,-6.675 v2(-14.5,-6.675) ; U4.5 -4.15,-0.421 -4.004,-0.275 -2.631,-0.275 -2.485,-0.421 U4.8 -1.95,-1.1 ; U6.8 -2.51,3.675 -2,3.675 ; C12.2 C12.2@2.204,6.479 ; v1@3.271,6.479 v1@3.275,6.475
  Bottom Layer w0.3: U6.5 -4.194,4.349 -4.018,4.525 -2.85,4.525 -2.674,4.349 -2.674,3.681 -2.649,3.656 U6.8 ; -2,3.675 -1.8,3.675 ; -1.95,-1.1 -1.75,-1.1 ; C20.1@-1.15,-1.1 C20.1 ; v1(14.1,2.225) 15.702,3.827 IC1.3
  Bottom Layer w0.5: R14.1 -8.85,-12.75 -8.317,-12.217 C10.2 -8.317,-8.98 -8.289,-8.952 v1(-8.289,-8.925) ; C13.2 v1@-9.308,6.383 ; v2@-9.1,1.15 R10.2 ; -8.964,-3.575 -8.936,-3.575 -8.895,-3.533 C14.2 ; -3.55,15.9 C23.1 -3.5,16.725 v2(-2.475,16.725) ; -1.8,3.675 -1.175,3.675 C22.1 v1(-1.1,4.725) ; -1.75,-1.1 C20.1@-1.15,-1.1 ; C20.1 v1(-1.075,0) ; C12.2@2.204,6.479 v1@3.271,6.479 ; v1(3.211,-5.95) 3.211,-5.923 3.258,-5.876 C11.2 ; R13.1@14.1,1.1 v1(14.1,2.225)
  other v1: 18.95,-12.525 18.95,-10.9 23.575,-9.65 18.95,-9.275 21.2,-7.55 23.575,-7.525 3.25,6.475 -14.2,10.025 4,21.025
  other v2: 23.525,16.1
+5V: C4.2 C5.2 C6.2 C7.2 C8.2 IC1.7 IC2.7 IC3.7 JP1.1 JP2.1 L1.2 R3.2 TP1.0 U2.3 | length 9.9
  Top Layer w0.7: v1(-17.5,21.025) -17.497,21.022 JP2.1 ; R3.2 2.575,-13.75 3.685,-12.64 5.035,-12.64 C4.2
  Bottom Layer w0.3: IC3.7 -16.317,-11.064 -16.317,-9.732 v1(-16.303,-9.719) ; v2(16.199,6.502) 16.201,6.503 IC1.7 IC1.7 ; v1@16.225,-1.85 16.227,-1.848 IC2.7
  other v1: 7.2,-21.725 7.2,-20.1 16.425,-15.2 16.217,-2.079
Buzzer: JP2.9 U3.5 | length 19.1
  Top Layer w0.25: v2(-12,4.05) -11.932,4.05 -11.732,4.25 U3.5 ; JP2.9 -7.497,18.172 -7.05,17.725 -7.05,13.963 v2(-7.018,13.932)
  Bottom Layer w0.25: v2(-12,4.05) -10.525,5.525 -10.525,10.4 -7.018,13.907 v2(-7.018,13.932)
DEBUG_RX: IC1.1 P3.2 | length 4.4
  Top Layer w0.5: v2(17.725,5.225) 17.731,5.219 P3.2
  Bottom Layer w0.25: IC1.1 16.712,5.033 16.712,4.396 16.858,4.25 17.579,4.25 17.725,4.396 v2(17.725,5.225)
DEBUG_TX: IC1.8 P3.0 | length 4.5
  Top Layer w0.5: v2(17.725,7.7) 17.744,7.719 P3.0
  Bottom Layer w0.25: IC1.8 16.7,7.855 16.7,8.579 16.846,8.725 17.579,8.725 17.725,8.579 v2(17.725,7.7)
GND: C2.1 C3.1 C4.1 C5.1 C6.1 C7.1 C8.1 C10.1 C11.1 C12.1 C13.1 C14.1 C15.2 C16.2 C17.2 C18.2 C19.2 C20.2 C21.2 C22.2 C23.2 D2.1 D3.2 IC1.2 IC2.2 IC3.2 J1.2 J2.6 J2.S1 J2.S2 J2.S3 J2.S4 JP1.2 JP2.10 P1.1 P2.1 P3.1 P4.1 P5.1 R2.1 R4.2 R5.2 R7.1 R9.1 R12.1 U1.5 U2.1 U3.10 U3.19 U3.26 U3.49 U3.74 U3.99 U4.6 U4.7 U4.10 U4.11 U5.3 U5.4 U5.5 U6.6 U6.7 U6.10 U6.11 U7.C5 U7.E1 U7.E3 | length 154.8
  Top Layer w0.25: U5.5 U5.5@-17.57,10.7 ; -13.2,2.825 -12.8,2.825 -11.74,1.765 -10.75,1.765 U3.10 ; U3.19 -9.625,-2.75 v1(-9.325,-2.45) ; v1(-9.375,-8.925) -9.375,-8.83 -9.07,-8.525 -9.07,-7.445 U3.26 ; U3.99 -8.555,6.775 -8.239,6.459 v1(-8.239,6.4) ; v1(2.15,-5.95) 2.15,-5.98 2.445,-6.275 U3.49 2.445,-8.559 v1@2.811,-8.925 ; v1(3.25,5.375) 3.345,5.375 3.705,5.735 4.61,5.735 U3.74 5.905,5.75 6.13,5.975 v1@6.225,5.975
  Top Layer w0.3: P2.1 -21.351,3.725 -20,3.725 -19.475,4.25 -15.5,4.25 -15.15,3.9 ; -13.4,2.825 -13.2,2.825 ; R7.1@-0.3,-11.2 R7.1
  Top Layer w0.5: v2@-23.15,11.7 C21.2 -21.95,11.7 -21.696,11.954 U5.3 U5.4 U5.5 ; v1(-21.25,-17.5) P1.1@-19.536,-17.5 ; v1(-21.25,-9.675) -21.247,-9.672 -19.516,-9.672 P5.1 ; -19.975,-0.475 -19.975,-2.325 -19.3,-3 -14.2,-3 ; -19.513,-20.312 P1.1 ; -15.15,3.9 -14.825,3.575 ; R12.1 -14.675,7.125 -14.575,7.225 -14.575,7.325 -14.2,7.7 v1(-14.2,8.55) ; -13.55,2.825 -13.4,2.825 ; v1(-12.125,-13.7) R4.2 -9.565,-13.71 -7.709,-13.71 U1.5 ; v1(-6.25,21.025) -6.247,21.022 JP2.10 ; R7.1@-0.3,-11.2 v1(-0.3,-8.925) ; R5.2 1.081,-17.981 1.081,-19.231 v1(1.1,-19.25) ; J1.2 v1(3,21.025) ; v1(5.075,-15.725) C4.1 C5.1 7.325,-14.55 8.572,-14.55 9.039,-14.083 C6.1 C7.1 C8.1 ; v1(15.125,-21.2) 15.127,-21.198 JP1.2 ; U2.1 16.775,-8.425 v1(18.15,-7.05) ; P4.1 v2@21.125,-2.125 ; P3.1 21.269,6.469 v2(21.275,6.475) ; D3.2 23.681,-14.045 23.681,-13.246 24.025,-12.902 v1(24.025,-12.875)
  Top Layer w0.7: P2.1 -21.451,5.449 v1(-21.2,5.7) ; -19.975,-0.475 -19.975,0.025 ; -19.513,-20.312 -18.75,-21.075 C2.1 ; C3.1 -14.925,-22.6 -14.225,-23.3 R2.1 -7.71,-23.3 D2.1 ; -14.825,3.575 -14.2,2.95 C17.2 -14.2,2.825 -13.55,2.825 ; C18.2 -14.2,-3.95 -14.2,-3 C19.2 ; R9.1 v1(-2.675,9.975) ; v1(6.375,12.625) 7.675,12.625 J2.S2 ; J2.S4 7.475,20.225 v1(8.425,20.225) ; J2.6 v1(11.1,14.55) ; J2.S1 v2(20.675,12.65) ; v1(19.375,19.6) J2.S3
  Top Layer w1: P2.1 -21.451,3.325 -19.975,1.849 -19.975,0.025 ; v1(-17.125,-23.175) C2.1 C3.1
  Bottom Layer w0.1: -5.05,15.9 -4.932,15.782 U7.E1 U7.E3 -4.366,14.687 -4.154,14.475 U7.C5
  Bottom Layer w0.2: -5.25,16.2 -5.25,16.1 -5.05,15.9
  Bottom Layer w0.25: v1(-21.25,-9.675) -21.183,-9.608 -21.183,-9.335 -21.013,-9.165 -16.593,-9.165 -16.341,-8.913 -16.341,-8.278 IC3.2 ; U4.7 -3.15,-1.71 -2.81,-2.05 -2.535,-2.05 U4.10 ; IC1.2 16.202,5.713 16.442,5.953 21.124,5.953 21.222,6.05 21.222,6.422 v2(21.275,6.475) ; IC2.2 16.237,-3.522 16.237,-2.887 16.477,-2.647 21.075,-2.647 21.222,-2.501 21.222,-2.246 21.275,-2.193 v2(21.275,-2.125)
  Bottom Layer w0.3: -5.25,16.2 C23.2 ; U6.6 U6.7 -3.194,3.011 -2.864,2.681 -2.554,2.681 U6.10 U6.11 -2.51,2.175 -1.95,2.175 ; U4.6 U4.7 ; U4.10 U4.11 -2.46,-2.625 -1.175,-2.625 C20.2 ; v2@0.032,-2.725 v2(0.038,-2.731)
  Bottom Layer w0.5: C10.1 -9.383,-9.9 -9.375,-9.892 v1(-9.375,-8.925) ; -8.947,-2.467 C14.1 ; C13.1 -8.242,5.425 -8.239,5.428 v1(-8.239,6.4) ; v1(-6.25,21.025) -5.593,21.025 -5.25,20.682 C23.2 ; -1.95,2.175 -1.225,2.175 C22.2 v2(-0.05,2.05) ; C20.2 v2@0.032,-2.725 ; v1(2.15,-5.95) 2.15,-5.923 2.192,-5.881 C11.1 ; C12.1 3.181,5.417 3.223,5.375 v1(3.25,5.375) ; C16.2 2.733,-9.9 2.736,-9.897 v1(2.736,-8.925) ; v1@6.254,6.054 C15.2@7.096,6.054
  other v1: 6.246,6.046
  other v2: -23.175,11.7
GPS_RX: JP2.2 U3.57 | length 52.9
  Top Layer w0.25: JP2.2 -16.247,16.872 v2(-16.225,16.85) ; U3.57 5.725,-2.75 v2(6.225,-2.25)
  Bottom Layer w0.25: v2(-16.225,16.85) -16.225,5.95 -11.875,1.6 -11.875,-5.7 -9.65,-7.925 3.95,-7.925 7.05,-4.825 7.05,-3.075 v2(6.225,-2.25)
GPS_S_LED: JP2.7 U3.2 | length 18
  Top Layer w0.2: v2@-12.55,12.375 -12.55,5.975 -12.325,5.75 U3.2 ; JP2.7 -9.997,18.497 v2(-8.225,16.725)
  Bottom Layer w0.2: v2@-12.55,12.375 -12.55,12.387 -8.225,16.712 v2(-8.225,16.725)
  other v2: -12.525,12.375
GPS_S_SW: JP2.6 U3.1 | length 16.3
  Top Layer w0.2: v2(-12.525,13.9) -11.5,12.875 -11.5,6.375 -11.375,6.25 U3.1 ; JP2.6 -11.247,18.397 v2(-9.625,16.775)
  Bottom Layer w0.2: v2(-12.525,13.9) -12.5,13.9 v2(-9.625,16.775)
GPS_TX: JP2.3 U3.56 | length 47.8
  Top Layer w0.25: JP2.3 -14.986,19.512 -14.986,16.861 v2(-14.975,16.85) ; U3.56 5.78,-3.25 6.177,-3.647 6.177,-3.727 v2@6.225,-3.775
  Bottom Layer w0.25: v2(-14.975,16.85) -14.975,6.1 -10.425,1.55 -10.425,-5.75 -9.1,-7.075 3.35,-7.075 6.225,-4.2 v2@6.225,-3.775
  other v2: 6.225,-3.75
I2C_SCL: JP2.4 R16.1 U3.95 U5.8 U7.A3 | length 29.7
  Top Layer w0.25: v2@-13.747,16.9 -13.725,16.878 v2(-13.725,16.825) ; v2@-11.173,16.777 -10.902,16.777 v2@-6.175,12.05 ; U3.95 -6.555,9.245 -6.225,9.575 v2(-6.225,12.05)
  Top Layer w0.3: U5.8 -15.421,14.454 -13.747,16.128 -13.747,16.9 JP2.4
  Top Layer w0.5: R16.1 -19.945,16.375 -18.024,14.454 U5.8
  Bottom Layer w0.1: -5.15,13.125 U7.A3
  Bottom Layer w0.2: v2@-11.175,16.775 v2@-11.15,16.75 ; v2@-6.175,12.05 -6.175,12.1 -5.15,13.125
  Bottom Layer w0.25: v2(-13.725,16.825) -13.7,16.8 -11.2,16.8 v2@-11.175,16.775
  other v2: -11.175,16.825
I2C_SDA: JP2.5 R15.1 U3.96 U5.7 U7.B4 | length 25.4
  Top Layer w0.25: -12.497,15.297 -11.702,15.297 -7.052,10.648 -7.052,7.932 U3.96 ; JP2.5@-12.497,18.973 JP2.5
  Top Layer w0.3: R15.1 -14.525,13.175 -12.497,15.203 JP2.5@-12.497,18.973
  Top Layer w0.5: U5.7 -17.559,13.19 -15.49,13.19 R15.1
  Bottom Layer w0.1: -4.175,13.125 -4.083,13.217 U7.B4
  Bottom Layer w0.2: v2(-7.05,10.6) -6.993,10.657 -6.643,10.657 -4.175,13.125
IMU_INT1: U3.34 U4.4 | length 7.7
  Top Layer w0.25: U3.34 -5.05,-7.425 -5.05,-4.35 -4.825,-4.125 v2(-4.825,-0.475)
  Bottom Layer w0.25: v2(-4.825,-0.475) -4.815,-0.485 U4.4
IMU_INT2: U3.35 U6.4 | length 12.5
  Top Layer w0.25: v2(-5.575,3.66) -5.575,2.775 -4.25,1.45 -4.25,-6.025 -4.555,-6.33 U3.35
  Bottom Layer w0.25: v2(-5.575,3.66) -5.573,3.658 -4.861,3.658 U6.4
LED_TEST: D4.1 U3.4 | length 3.9
  Top Layer w0.25: -13.624,4.75 -11.875,4.75 U3.4
  Top Layer w0.3: D4.1@-14.349,5.475 -13.999,5.125 -13.624,4.75
MAG_INT: U3.3 U7.D2 | length 18.8
  Top Layer w0.3: v2(-13.45,11.5) -13.45,5.85 -12.85,5.25 U3.3
  Bottom Layer w0.1: -5.95,14.758 U7.D2
  Bottom Layer w0.2: -6.225,14.75 -6.217,14.758 -5.95,14.758
  Bottom Layer w0.3: v2(-13.45,11.5) -11.25,11.5 -8,14.75 -6.225,14.75
MAG_RDY: U3.98 U7.D4 | length 11.4
  Top Layer w0.2: U3.98 -8.052,7.932 -8.052,9.872 v2@-8.05,9.875
  Bottom Layer w0.1: U7.D4 -3.133,14.758 -2.775,14.4
  Bottom Layer w0.2: v2(-8.05,10.025) -5.85,10.025 -2.575,13.3 -2.575,14.2 -2.775,14.4
NetC1_1: C1.1 D2.2 L1.1 U1.1 | length 15.2
  Top Layer w0.5: -4.1,-21.35 -4.342,-21.108 C1.1 -3.625,-19.65 -2.251,-18.276 U1.1
  Top Layer w0.7: -4.1,-21.35 -3.875,-21.575 -3.875,-21.6
  Top Layer w1: -3.875,-21.6 -3.84,-21.6 -2.49,-22.95 2.639,-22.95 3.225,-22.364 3.225,-21.088 L1.1
NetC1_2: C1.2 U1.8 | length 7.6
  Top Layer w0.5: v1(-9.275,-19.65) C1.2 ; v1(-9.275,-17.525) -9.27,-17.53 U1.8
  Bottom Layer w0.5: v1(-9.275,-19.65) v1(-9.275,-17.525)
NetC2_2: C2.2 C3.2 D1.2 R1.2 U1.7 | length 12.4
  Top Layer w0.5: C3.2@-14.913,-19.162 -12.163,-19.162 R1.2 D1.2@-12.15,-16.231 ; D1.2 D1.2@-12.15,-16.231 ; D1.2@-12.121,-16.26 D1.2@-12.15,-16.231
  Top Layer w0.6: D1.2@-12.121,-16.26 U1.7
  Top Layer w1: C2.2 C3.2 C3.2@-14.913,-19.162
NetC9_1: C9.1 R5.1 | length 1.7
  Top Layer w0.7: R5.1 C9.1
NetC9_2: C9.2 U1.3 | length 2
  Top Layer w0.6: U1.3 -2.246,-14.995 -0.255,-14.995 C9.2
NetD3_1: D3.1 R8.1 | length 2.1
  Top Layer w0.5: R8.1@21.425,-15.9 D3.1
NetD4_2: D4.2 R12.2 | length 1.7
  Top Layer w0.7: D4.2 -16.099,7.125 R12.2
NetIC1_6: IC1.6 R11.2 | length 1.9
  Bottom Layer w0.25: R11.2 15.477,9.625 15.702,9.4 IC1.6
NetIC2_6: IC2.6 R13.2 | length 2
  Bottom Layer w0.2: R13.2 15.477,1.075 15.727,0.825 IC2.6
NetIC3_6: IC3.6 R14.2 | length 1.8
  Bottom Layer w0.2: IC3.6 -15.831,-12.5 -15.581,-12.75 R14.2
NetR1_1: R1.1 R2.2 U1.2 | length 13.6
  Top Layer w0.25: R1.1 -11.946,-20.246 -11.571,-20.246 -10.05,-18.725 -4.4,-18.725 -3.367,-17.692 -3.367,-16.926 -2.702,-16.26 U1.2
  Top Layer w0.7: R2.2 R1.1
NetR3_1: R3.1 R6.1 U1.4 | length 3.3
  Top Layer w0.5: U1.4 U1.4@-2.236,-13.735 ; R3.1@-0.265,-13.735 R3.1
  Top Layer w0.6: U1.4@-2.236,-13.735 R3.1@-0.265,-13.735
  Top Layer w0.7: R3.1 R6.1
NetR4_1: R4.1 U1.6 | length 1.9
  Top Layer w0.5: R4.1 -9.57,-14.995 -7.704,-14.995 U1.6
NetR6_2: R6.2 R7.2 | length 1.2
  Top Layer w0.7: R6.2 R7.2
NetR9_2: R9.2 U3.94 | length 2.6
  Top Layer w0.25: U3.94 -6.04,7.945 -6.04,8.885 -5.275,9.65 -5.275,9.75 -5.05,9.975 R9.2
PH0: C17.1 CT1.2 U3.12 | length 7.2
  Top Layer w0.25: -12.7,0.9 -12.55,0.75 U3.12
  Top Layer w0.3: -12.875,1.075 -12.7,0.9
  Top Layer w0.5: -13.05,1.25 -12.875,1.075
  Top Layer w0.7: C17.1 -14.2,1.533 -13.333,1.533 -13.05,1.25
  Top Layer w1: CT1.2 -16.744,2.759 -15.535,1.55 C17.1
PH1: C19.1 CT1.1 U3.13 | length 7.1
  Top Layer w0.25: -12.725,0.075 -12.55,0.25 U3.13
  Top Layer w0.3: -12.9,-0.1 -12.725,0.075
  Top Layer w0.5: -13.075,-0.275 -12.9,-0.1
  Top Layer w0.7: C19.1 -13.125,-0.325 -13.075,-0.275
  Top Layer w1: CT1.1 -16.744,-1.559 -15.51,-0.325 C19.1
RST: C18.1 J1.5 P2.2 R10.1 U3.14 | length 42.6
  Top Layer w0.25: -12.9,-1.525 -12.909,-1.516 -12.909,-1.309 -11.85,-0.25 U3.14 -10.72,-0.235 -9.478,-0.235 -9.393,-0.15 v2(-9.325,-0.15) -7.65,1.525 -7.65,5.975 v2(-7.225,6.4) ; v2(-0.025,16.725) -0.025,19.473 J1.5
  Top Layer w0.3: -12.9,-1.8 -12.9,-1.525
  Top Layer w0.5: -12.9,-2.05 -12.9,-1.8
  Top Layer w0.7: P2.2 -21.451,-3.075 -20.576,-3.95 C18.1@-15.628,-3.95 ; C18.1 C18.1@-15.628,-3.95 ; -12.9,-2.05 -12.9,-4.65 -13.4,-5.15 -15.2,-5.15 -15.628,-4.722 C18.1@-15.628,-3.95
  Bottom Layer w0.25: v2(-7.225,6.4) -0.025,13.6 v2(-0.025,16.725)
  Bottom Layer w0.5: v2(-9.325,-0.15) R10.1
SDMMC_CLK: J2.5 U3.80 | length 15.5
  Top Layer w0.25: U3.80 0.96,7.945 0.96,10.735 1.425,11.2 12.054,11.2 12.2,11.346 J2.5
SDMMC_CMD: J2.3 R18.1 U3.83 | length 28.5
  Top Layer w0.25: U3.83 -0.555,10.52 v1(-0.525,10.55) ; v1(2.075,10.525) 13.55,10.525 14.4,11.375 14.4,13.85 18.075,17.525 R18.1
  Bottom Layer w0.25: v1(-0.525,10.55) -0.5,10.525 v1(2.075,10.525)
SDMMC_D0: J2.7 R22.1 U3.65 | length 26.6
  Top Layer w0.25: U3.65 9,1.25 v1(9.975,2.225) ; R22.1 R22.1@6.238,15.912 ; v1@9.938,15.912 v1(9.975,15.875) v1@9.988,15.862 ; J2.7@9.988,12.538 J2.7
  Top Layer w0.7: R22.1@6.238,15.912 v1@9.938,15.912 ; J2.7@9.988,12.538 v1@9.988,15.862
  Bottom Layer w0.25: v1(9.975,2.225) v1@9.975,15.863
SDMMC_D1: J2.8 R21.1 U3.66 | length 21.5
  Top Layer w0.25: U3.66 6.4,1.75 6.825,2.175 v1(8.9,2.175)
  Top Layer w0.7: R21.1 6.212,14.537 8.888,14.537 v1(8.9,14.525) J2.8
  Bottom Layer w0.25: v1(8.9,2.175) v1(8.9,14.525)
SDMMC_D2: J2.1 R20.1 U3.78 | length 23.6
  Top Layer w0.25: U3.78 1.96,7.945 1.96,8.804 2.406,9.25 14.975,9.25 16.6,10.875 16.6,13.05 18.253,14.703 R20.1
SDMMC_D3: J2.2 R19.1 U3.79 | length 25
  Top Layer w0.25: U3.79 1.46,7.945 1.46,9.285 2.075,9.9 14.05,9.9 15.5,11.35 J2.2 15.5,13.65 17.964,16.114 R19.1
SDMMC_SW: J2.9 J2.10 R17.1 U3.7 | length 42
  Top Layer w0.25: U3.7 -9.7,3.25 -9.325,2.875 v2(-9.325,2.575) ; v2(4.15,16.675) 4.198,16.723 4.573,16.723 5.2,17.35 R17.1
  Top Layer w0.55: R17.1 5.2,20.45 6.547,21.797 7.728,21.797 J2.10 10.575,21.75 11.2,21.125 15.925,21.125 17.972,23.172 18.822,23.172 J2.9
  Bottom Layer w0.25: v2(-9.325,2.575) -8.425,2.575 -1.575,9.425 -1.575,10.625 4.121,16.321 4.121,16.646 v2(4.15,16.675)
SPI1_CS: U3.28 U4.12 | length 9.5
  Top Layer w0.25: v2(-8.6,-5.825) -8.055,-6.37 U3.28
  Bottom Layer w0.25: v2(-8.6,-5.825) -8.325,-5.55 -4.325,-5.55 -3.125,-4.35 -3.125,-2.79 U4.12
SPI1_CS2: U3.32 U6.12 | length 11.7
  Top Layer w0.25: U3.32 -6.055,-6.116 -5.525,-5.586 v2(-5.525,-1.775)
  Bottom Layer w0.25: v2(-5.525,-1.775) -5.525,-0.2 -4.925,0.4 -3.4,0.4 -2.975,0.825 -2.975,1.675 -3.121,1.821 -3.144,1.821 -3.194,1.871 U6.12
SPI1_MISO: U3.30 U4.1 U6.1 | length 13.2
  Top Layer w0.25: U3.30 -7.04,-7.415 -7.04,-2.64 v1(-7.025,-2.625)
  Bottom Layer w0.25: U6.1 -5.669,2.156 -7.025,0.8 v1(-7.025,-2.625) -7.012,-2.612 -4.828,-2.612 U4.1
SPI1_MOSI: U3.31 U4.14 U6.14 | length 13.3
  Top Layer w0.25: U3.31 -6.555,-5.98 -6.375,-5.8 v2@-6.375,-3.55 ; v2(-6.4,-3.525) v2@-6.375,-3.55 ; v2(-4.85,1.225) -4.85,1.2 -6.375,-0.325 v2@-6.375,-3.55
  Bottom Layer w0.25: v2(-6.4,-3.525) -6.375,-3.55 -4.529,-3.55 -4.172,-3.192 -4.172,-2.787 U4.14 ; v2(-4.85,1.225) -4.84,1.225 -4.194,1.871 U6.14
SPI1_SCK: U3.29 U4.13 U6.13 | length 13.1
  Top Layer w0.25: v2(-7.825,-4.8) -7.825,-5.225 -7.57,-5.48 -7.57,-7.415 U3.29 ; v2(-3.675,-1.95) -3.687,-1.938 -3.687,1.212 v2(-3.675,1.225)
  Bottom Layer w0.25: v2(-7.825,-4.8) -4.675,-4.8 -3.65,-3.775 U4.13 -3.662,-2.752 -3.662,-1.963 v2(-3.675,-1.95) ; U6.13 -3.685,1.982 -3.685,1.235 v2(-3.675,1.225)
SWCLK: J1.4 U3.76 | length 12.6
  Top Layer w0.3: J1.4 1,15.1 v2@3.45,12.65
  Top Layer w0.5: U3.76@3.035,8.317 3.052,8.3 v2(3.45,8.3)
  Bottom Layer w0.2: v2(3.45,8.3) v2@3.45,12.65
  other v2: 3.45,12.625
SWDIO: J1.3 U3.72 | length 20.2
  Top Layer w0.25: U3.72 4.64,4.735 5.499,4.735 6.202,4.032 6.202,3.923 v2(6.25,3.875)
  Top Layer w0.3: J1.3 2,15.2 v2@4.55,12.65
  Bottom Layer w0.25: v2@4.55,12.65 4.55,4.325 5,3.875 v2(6.25,3.875)
  other v2: 4.55,12.625
UART6_RX_O: IC2.8 P4.0 | length 4.3
  Top Layer w0.5: v2(17.725,-0.9) P4.0@19.388,-0.9
  Bottom Layer w0.25: IC2.8 16.725,-0.72 16.725,-0.075 16.9,0.1 17.579,0.1 17.725,-0.046 v2(17.725,-0.9)
UART6_TX_O: IC2.1 P4.2 | length 4.4
  Top Layer w0.5: v2(17.75,-3.375) P4.2
  Bottom Layer w0.25: IC2.1 16.736,-3.541 16.736,-4.229 16.882,-4.375 17.604,-4.375 17.75,-4.229 v2(17.75,-3.375)
UART7_RX: IC3.4 U3.37 | length 14.3
  Top Layer w0.25: v2@-14.5,-9.775 -5.041,-9.775 -3.57,-8.304 -3.57,-7.445 U3.37
  Bottom Layer w0.25: IC3.4 -15.331,-8.693 -14.548,-9.476 -14.548,-9.727 v2@-14.5,-9.775
  other v2: -14.5,-9.719
UART7_RX_O: IC3.1 P5.2 | length 4
  Top Layer w0.5: P5.2 -17.906,-8.419 v2(-17.9,-8.425)
  Bottom Layer w0.25: v2(-17.9,-8.425) -17.9,-7.746 -17.754,-7.6 -16.987,-7.6 -16.841,-7.746 -16.841,-8.258 IC3.1
UART7_TX: IC3.5 U3.38 | length 14.9
  Top Layer w0.25: v2(-14.5,-11.125) -5,-11.125 -3.055,-9.18 U3.38
  Bottom Layer w0.25: IC3.5 -15.331,-11.115 -15.321,-11.125 v2(-14.5,-11.125)
UART7_TX_O: IC3.8 P5.0 | length 4.4
  Top Layer w0.5: P5.0 -17.894,-10.919 v2(-17.875,-10.9)
  Bottom Layer w0.25: v2(-17.875,-10.9) -17.9,-10.925 -17.9,-11.775 -17.725,-11.95 -17.025,-11.95 -16.841,-11.766 -16.841,-11.088 IC3.8
USART1_RX: IC1.5 U3.69 | length 12.9
  Top Layer w0.25: U3.69 6.575,3.25 8.175,4.85 10.575,4.85 12.225,6.5 v2(14.1,6.5)
  Bottom Layer w0.25: v2(14.1,6.5) 14.625,6.5 15.212,7.087 15.212,7.843 IC1.5
USART1_TX: IC1.4 U3.68 | length 11.5
  Top Layer w0.2: U3.68 7.3,2.75 8.475,3.925 10.975,3.925 12.05,5 v2(14.1,5)
  Bottom Layer w0.2: v2(14.1,5) 15.167,5 15.202,5.035 IC1.4
USART6_RX: IC2.5 U3.64 | length 11.8
  Top Layer w0.2: U3.64 4.665,0.71 6.54,0.71 7.075,0.175 13.3,0.175 v2(14.15,-0.675)
  Bottom Layer w0.2: v2(14.15,-0.675) 14.65,-1.175 15.192,-1.175 15.227,-1.14 IC2.5
USART6_TX: IC2.4 U3.63 | length 12.7
  Top Layer w0.2: U3.63 5.625,0.25 6.575,-0.7 12.85,-0.7 v2@14.2,-2.05
  Bottom Layer w0.2: v2(14.15,-2.079) 14.604,-2.079 15.238,-2.713 15.238,-3.521 IC2.4
VCAP1: C16.1 U3.48 | length 2.6
  Top Layer w0.25: v1@1.761,-8.925 1.761,-8.83 1.945,-8.647 U3.48
  Bottom Layer w0.5: C16.1 v1@1.667,-8.972 ; v1@1.667,-8.971 v1@1.667,-8.946
  other v1: 1.686,-8.925
VCAP2: C15.1 U3.73 | length 2.6
  Top Layer w0.25: U3.73 4.64,5.235 5.77,5.235 6.13,4.875 v1@6.225,4.875
  Bottom Layer w0.5: v1(6.246,4.946) 6.273,4.946 6.314,4.987 C15.1@7.096,4.987
Vin: D1.1 P1.2 | length 3
  Top Layer w0.5: D1.1@-16.577,-16.227 D1.1
  Top Layer w0.7: P1.2 D1.1@-16.577,-16.227
pads on no net: C20.0 C21.0 C22.0 C23.0 J1.6 J1.7 J1.8 JP1.3 JP1.4 JP2.11 JP2.12 P1.3 P1.4 P3.3 P4.3 P5.3 U1.EPAD U3.8 U3.9 U3.15 U3.16 U3.17 U3.18 U3.22 U3.23 U3.24 U3.25 U3.33 U3.36 U3.39 U3.40 U3.41 U3.42 U3.43 U3.44 U3.45 U3.46 U3.47 U3.51 U3.52 U3.53 U3.54 U3.55 U3.58 U3.59 U3.60 U3.61 U3.62 U3.67 U3.70 U3.71 U3.77 U3.81 U3.82 U3.84 U3.85 U3.86 U3.87 U3.88 U3.89 U3.90 U3.91 U3.92 U3.93 U3.97 U4.2 U4.3 U4.9 U5.6 U6.2 U6.3 U6.9

## Polygon pours and split planes (outlines as drawn)
GND on Top Layer "GND_L01_P013" (solid, remove dead copper, pour order 13): 24.75,24.75 -24.75,24.75 -24.75,-24.75 24.75,-24.75
NetC2_2 on Top Layer "NETC2_2_L01_P001" (solid, remove dead copper, pour order 1): -13.675,-15.5 -13.675,-17.65 -14.325,-18.3 -18.175,-18.3 -18.3,-18.425 -18.3,-19.75 -18.125,-19.925 -13.625,-19.925 -13.425,-19.725 -11.725,-19.725 -11.375,-19.375 -11.375,-17.55 -10.475,-16.65 -6.95,-16.65 -6.8,-16.5 -6.8,-16 -6.975,-15.825 -10.525,-15.825 -10.525,-15.8 -11.4,-14.925 -13.1,-14.925
Vin on Top Layer "VIN_L01_P000" (solid, pour order 0): -21.075,-15.825 -20.975,-15.725 -18.725,-15.725 -17.7,-14.7 -15.225,-14.7 -14.75,-15.175 -14.75,-17.225 -15.25,-17.725 -17.7,-17.725 -18.682,-16.675 -20.942,-16.675 -21.075,-16.55 -21.075,-16.475
3.3V on Top Layer "3.3V_L01_P002" (solid, remove dead copper, pour order 2): 23.075,13.775 23.85,13.775 24.225,14.15 24.225,18.15 23.8,18.575 21.95,18.575 21.5,18.125 21.5,14.1 21.825,13.775
+5V on Top Layer "+5V_L01_P003" (solid, pour order 3): 12.8,-13.4 13.225,-13.825 13.225,-15.9 10.725,-18.4 5.975,-18.4 5.65,-18.725 5.65,-23 5.95,-23.3 11.05,-23.3 11.95,-22.4 11.95,-18.825 14.275,-16.5 15.875,-16.5 15.875,-20.675 15.975,-20.775 16.825,-20.775 17.15,-20.45 17.15,-12.45 16.7,-12 8.95,-12 8.15,-11.2 4.625,-11.2 3.375,-12.45 3.375,-13.4
3.3V on Top Layer "3.3V_L01_P012" (solid, remove dead copper, pour order 12): 13.675,-11.225 13.9,-11.45 17.275,-11.45 17.775,-11.95 17.775,-16.15 18.45,-16.825 19.625,-16.825 20.125,-16.325 20.125,-15.425 20.35,-15.2 21.925,-15.2 22.2,-14.925 22.2,-13.3 24.35,-11.15 24.35,-6.4 20.75,-6.4 17.275,-9.875 14.025,-9.875 13.675,-10.225 13.675,-10.7
3.3V on PWR "3.3V_L03_P008" (solid, remove dead copper, pour order 8): 24.75,24.75 -24.75,24.75 -24.75,-24.75 24.75,-24.75
+5V on PWR "+5V_L03_P007" (solid, remove dead copper, pour order 7): 15.5,8.9 15.175,8.575 15.175,-9.55 13.525,-11.2 -13.75,-11.2 -16.1,-8.85 -16.1,20.675 -16.75,21.325 -18.4,21.325 -19.25,20.475 -19.25,-13.675 -18,-14.925 12.5,-14.925 13.3,-15.725 13.3,-17.9 12.425,-18.775 5.275,-18.775 4.175,-19.875 4.175,-22.25 5.225,-23.3 5.275,-23.25 16.525,-23.25 16.8,-23 17.05,-22.75 17.05,-22.175 17.05,8.65 16.8,8.9
GND on GND "GND_L02_P010" (solid, remove dead copper, pour order 10): 24.75,24.75 -24.75,24.75 -24.75,-24.75 24.75,-24.75
GND on Bottom Layer "GND_L04_P011" (solid, remove dead copper, pour order 11): 24.75,24.75 -24.75,24.75 -24.75,-24.75 24.75,-24.75

## Keep-outs
Bottom Layer:
  the board outline again, w0.254

## Silkscreen, mask and mechanical layers (free items; w line width, h text height)
Top Overlay:
  text "Tran Tien Dung" at 7.75,-4.293 h0.5
  text "TLPK2 K57" at 7.75,-5.396 h0.5
  text "NCKH 2026" at 7.75,-6.5 h0.5
Bottom Overlay:
  lines w0.1: -5.75,14.975 -5.75,15.975 -4.75,15.975 ; 0,-1 0,0 1,0
  text "X" at 0.8,0.375 h0.3
  text "Y" at 0.375,-1 h0.3
  text "Tran Tien Dung" at -2.1,-14.543 h0.5
  text "TLPK2 K57" at -2.1,-15.646 h0.5
  text "NCKH 2026" at -2.1,-16.75 h0.5

## Text inside footprints (layer, text, board x,y; h text height)
U1: Top Overlay "*" at -1.679,-17.962 h0.64 r180; Top 3D Body "*" at -3.045,-16.781 h0.64 r180